# Altium PCB CM5 Nas.PcbDoc (part 1 of 4)
Units mm, origin at the board's own origin, x right, y up, seen from the top; angles counter-clockwise.
Board outline 152.4 x 101.6 mm, 20 copper layers (F.Cu, F.Mask, B.Cu, B.Mask, In1.Cu, F.SilkS, In2.Cu, B.SilkS, F.Adhes, B.Adhes, F.Paste, B.Paste, Dwgs.User, Cmts.User, Eco1.User, Eco2.User, Edge.Cuts, Margin, B.CrtYd, F.CrtYd); 373 components, 619 nets, 1990 pads, 0 vias.
Unrouted connection lines stored in the file: 1086.
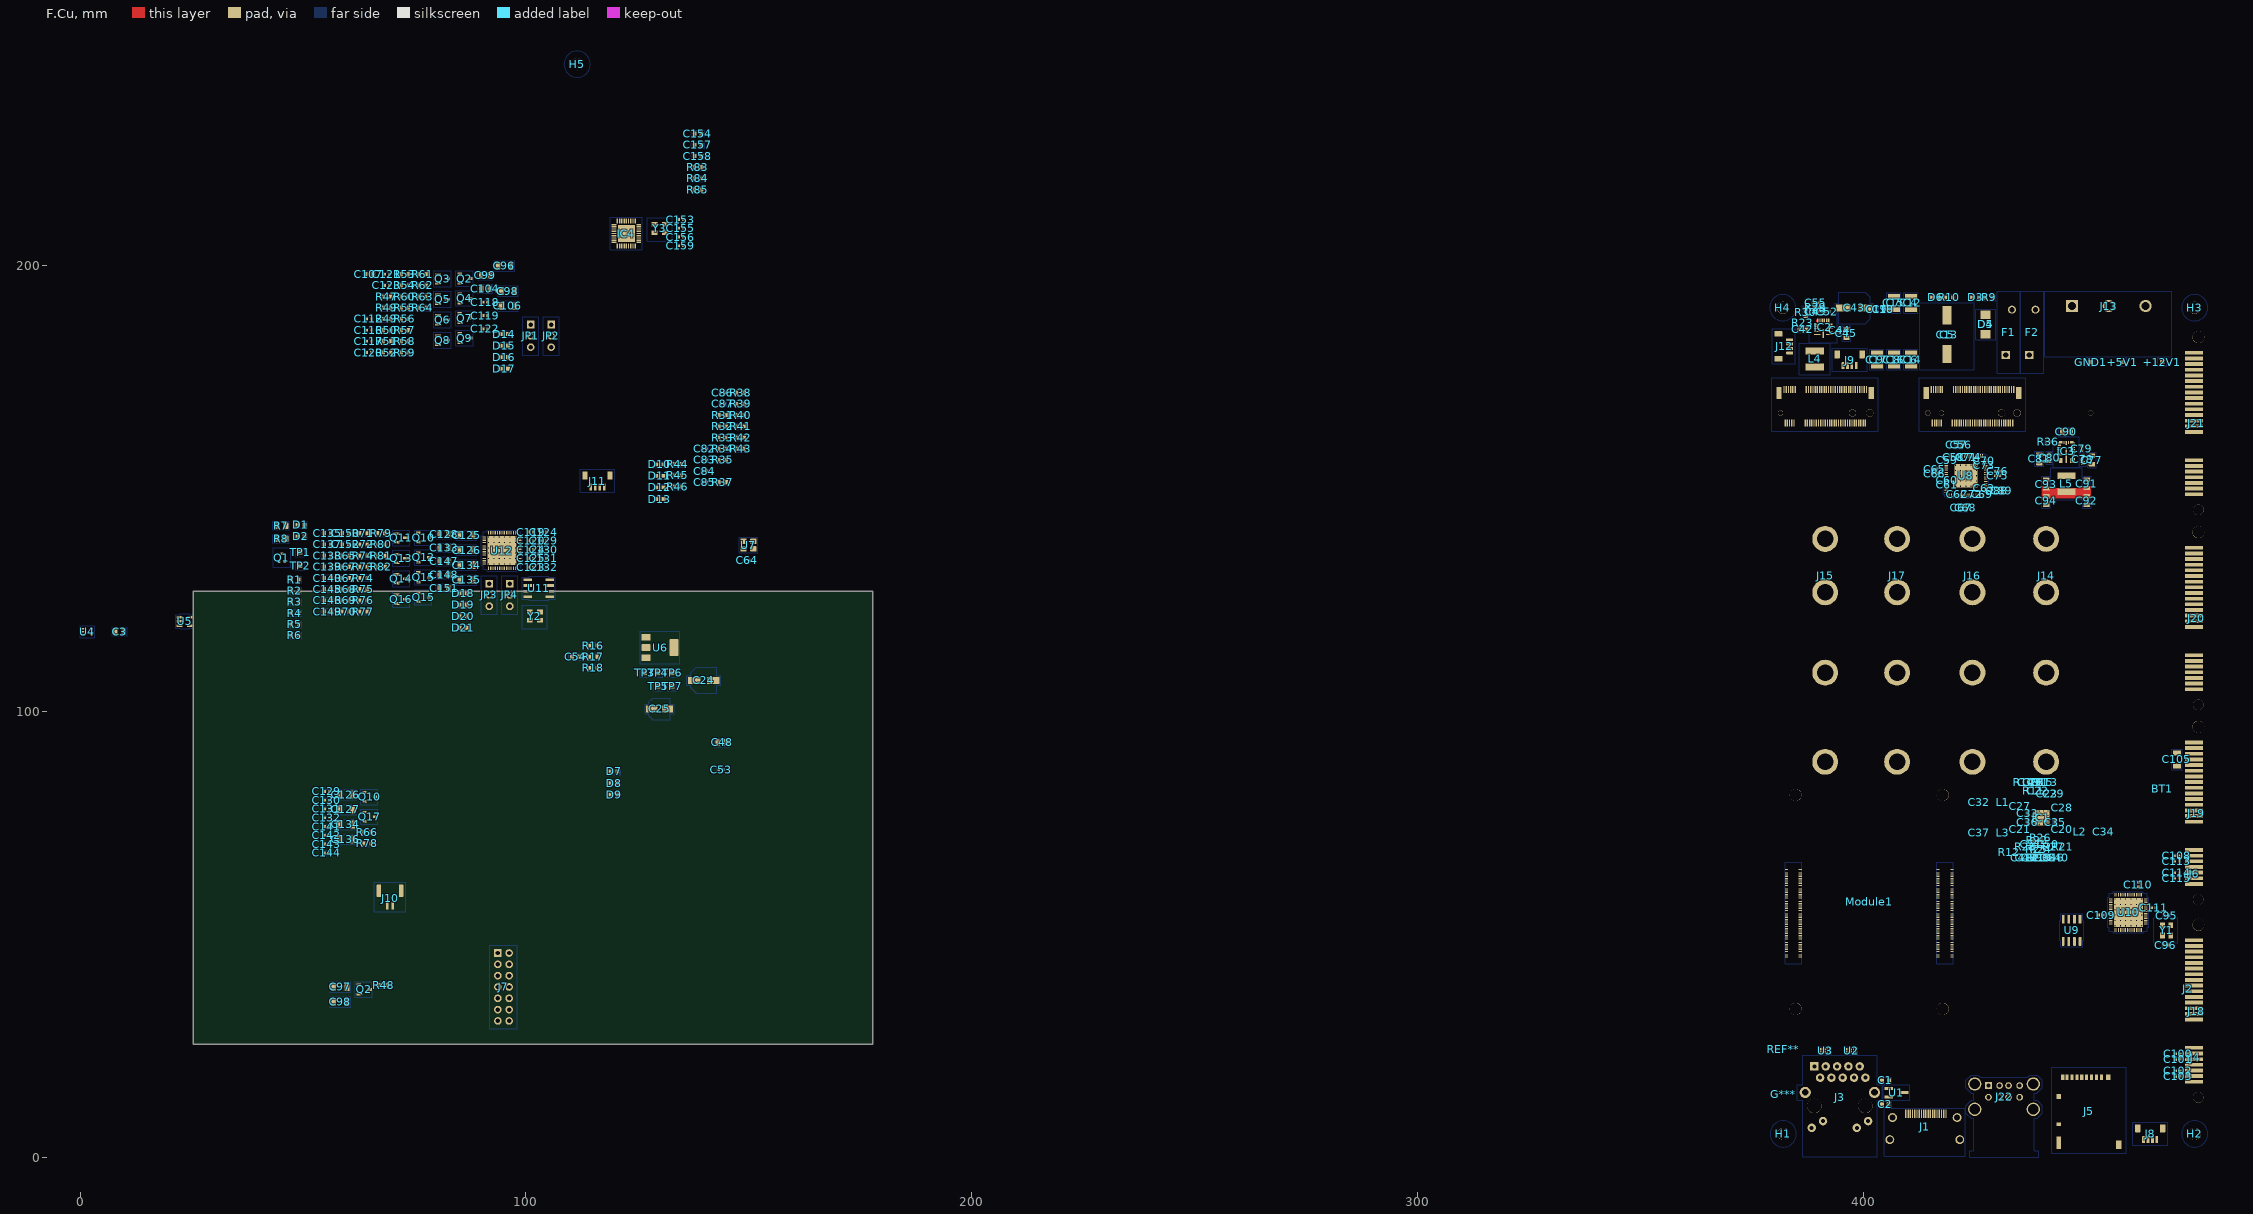
[diagram p0: F.Cu view]
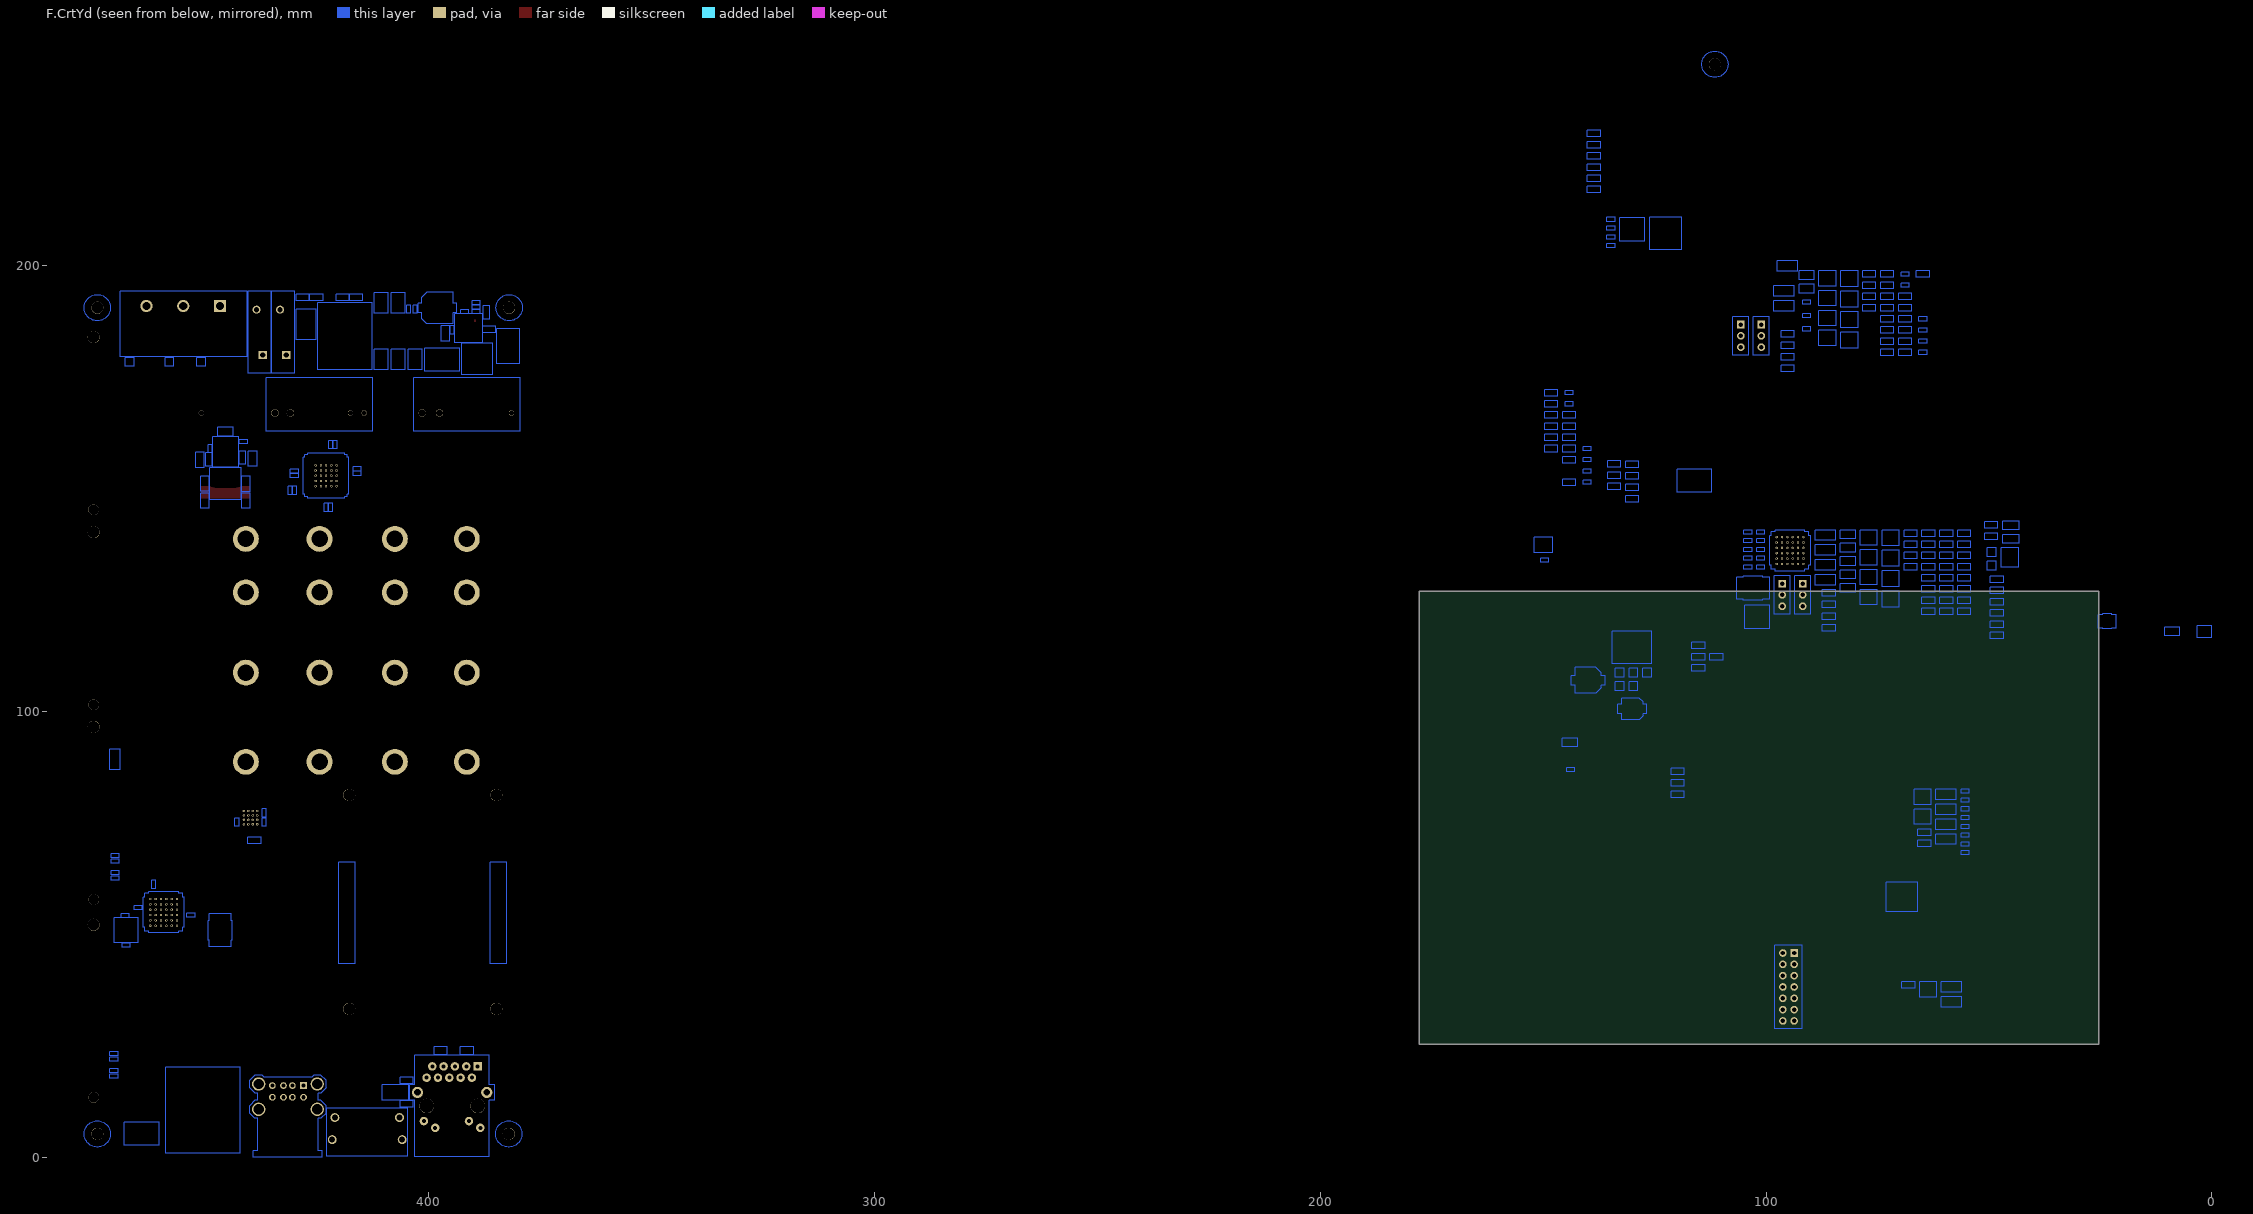
[diagram p1: F.CrtYd view, seen from below]
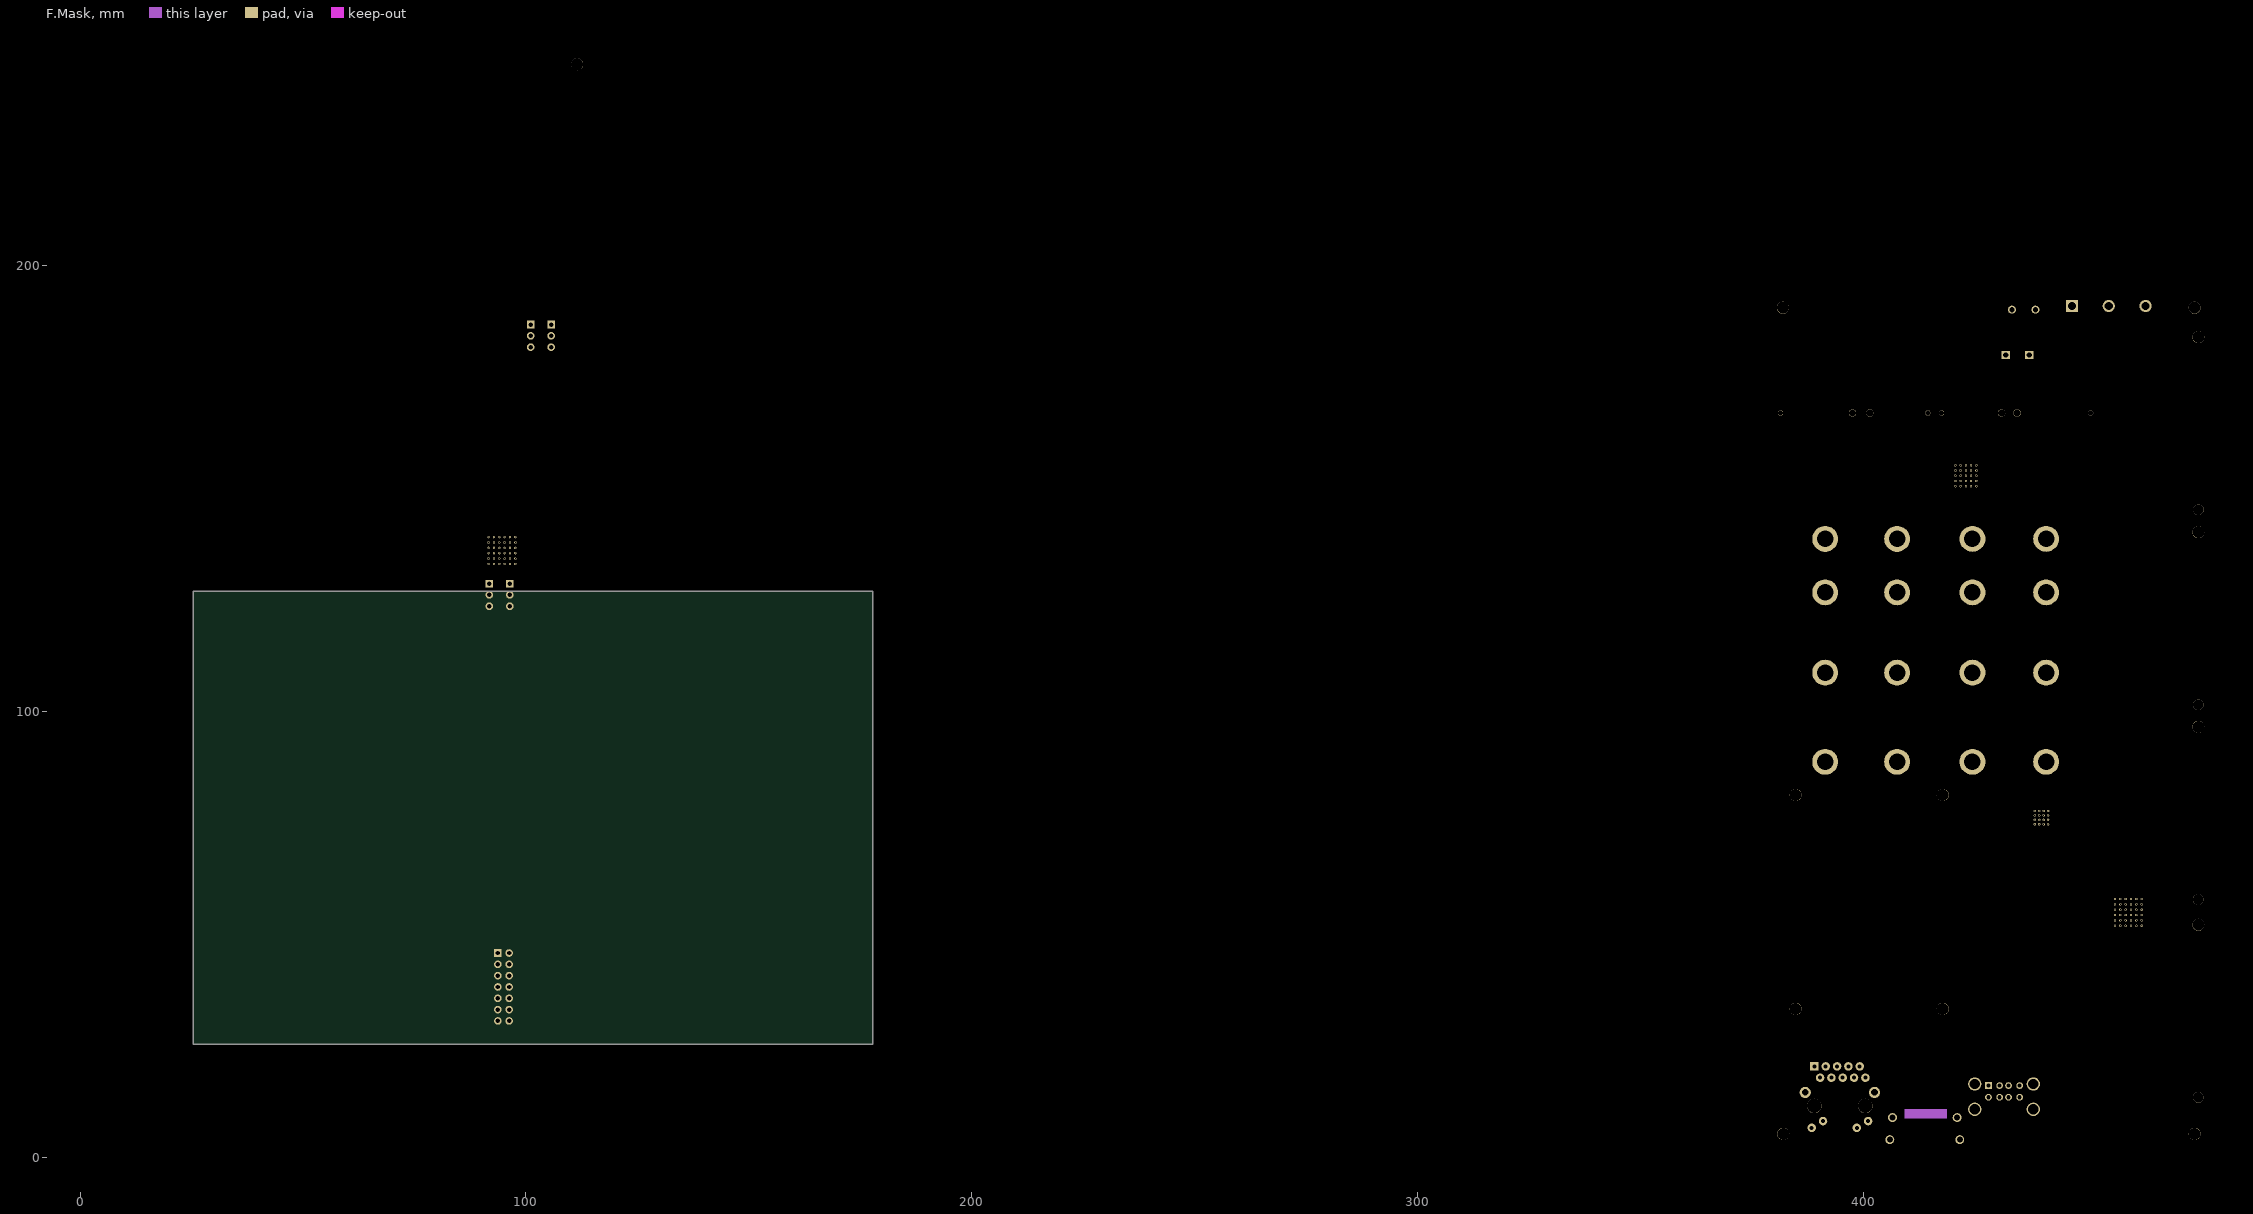
[diagram p2: F.Mask]
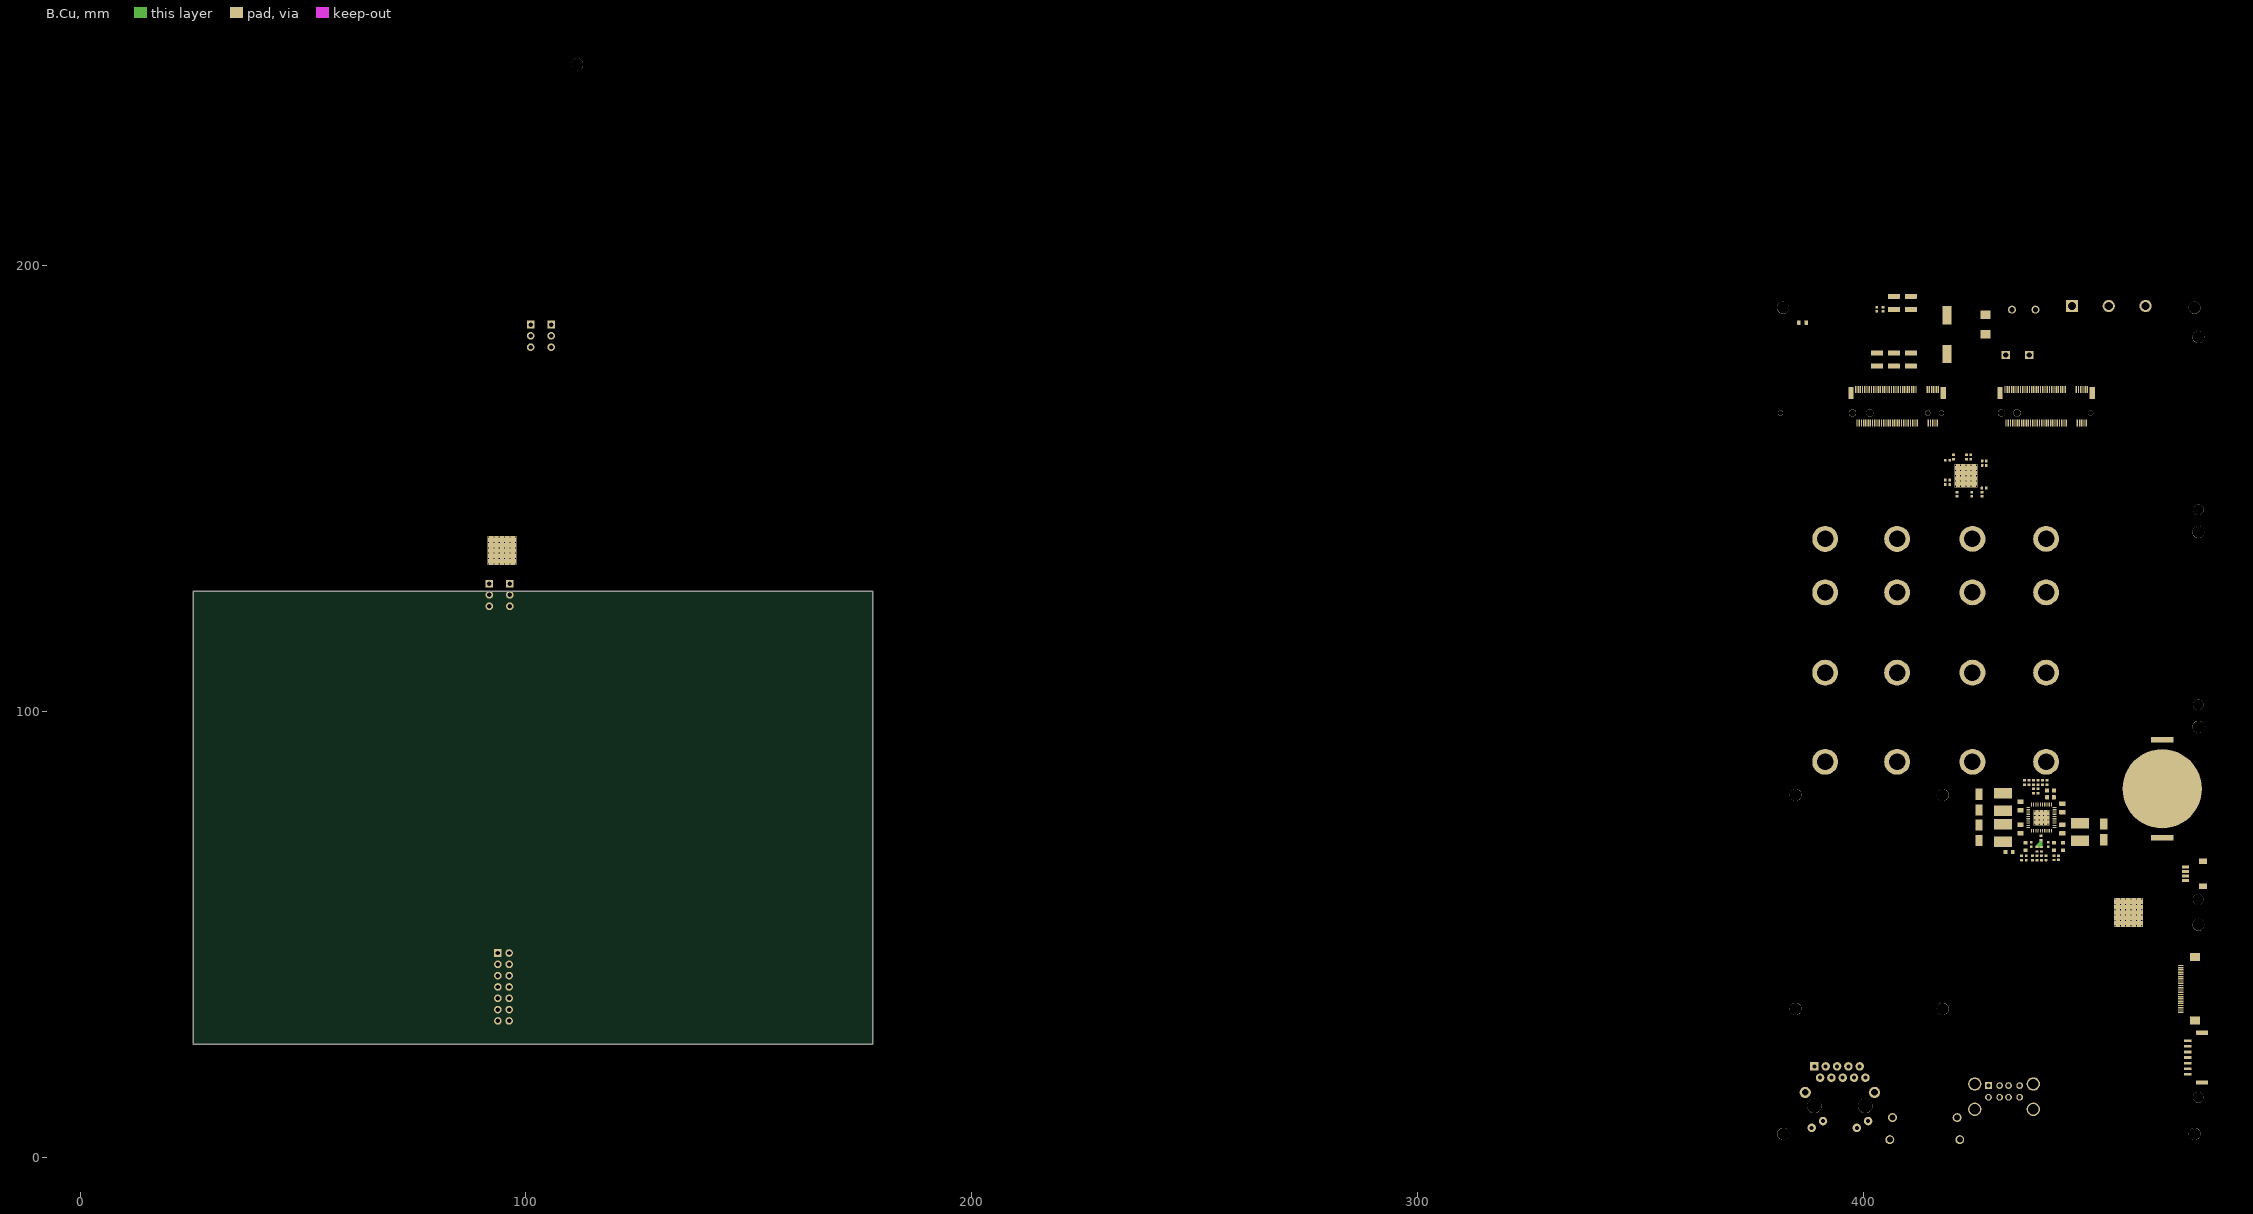
[diagram p3: B.Cu]
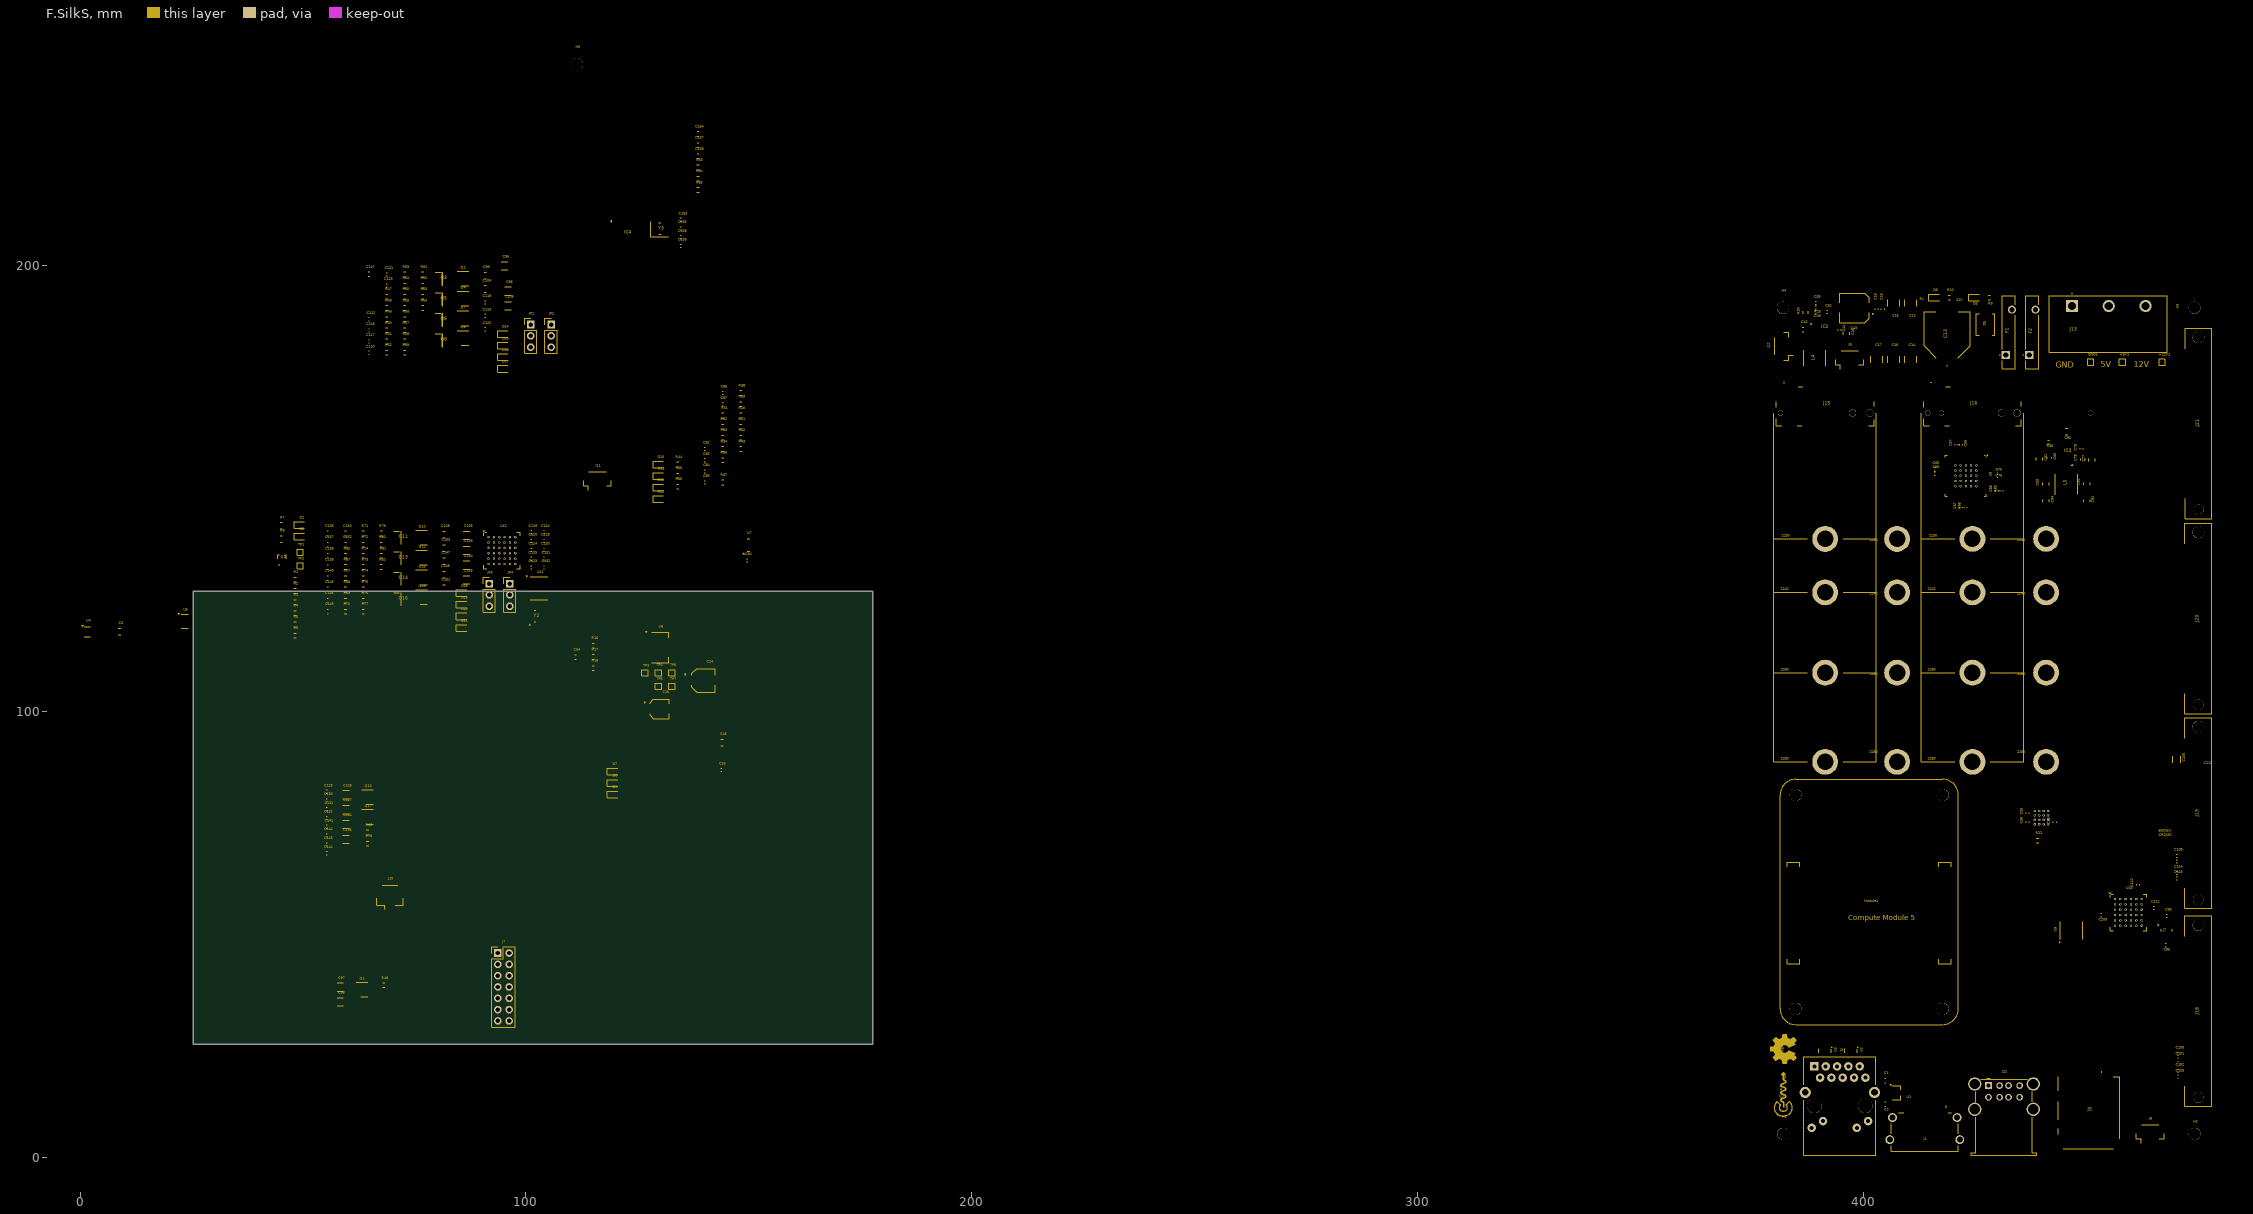
[diagram p4: F.SilkS]
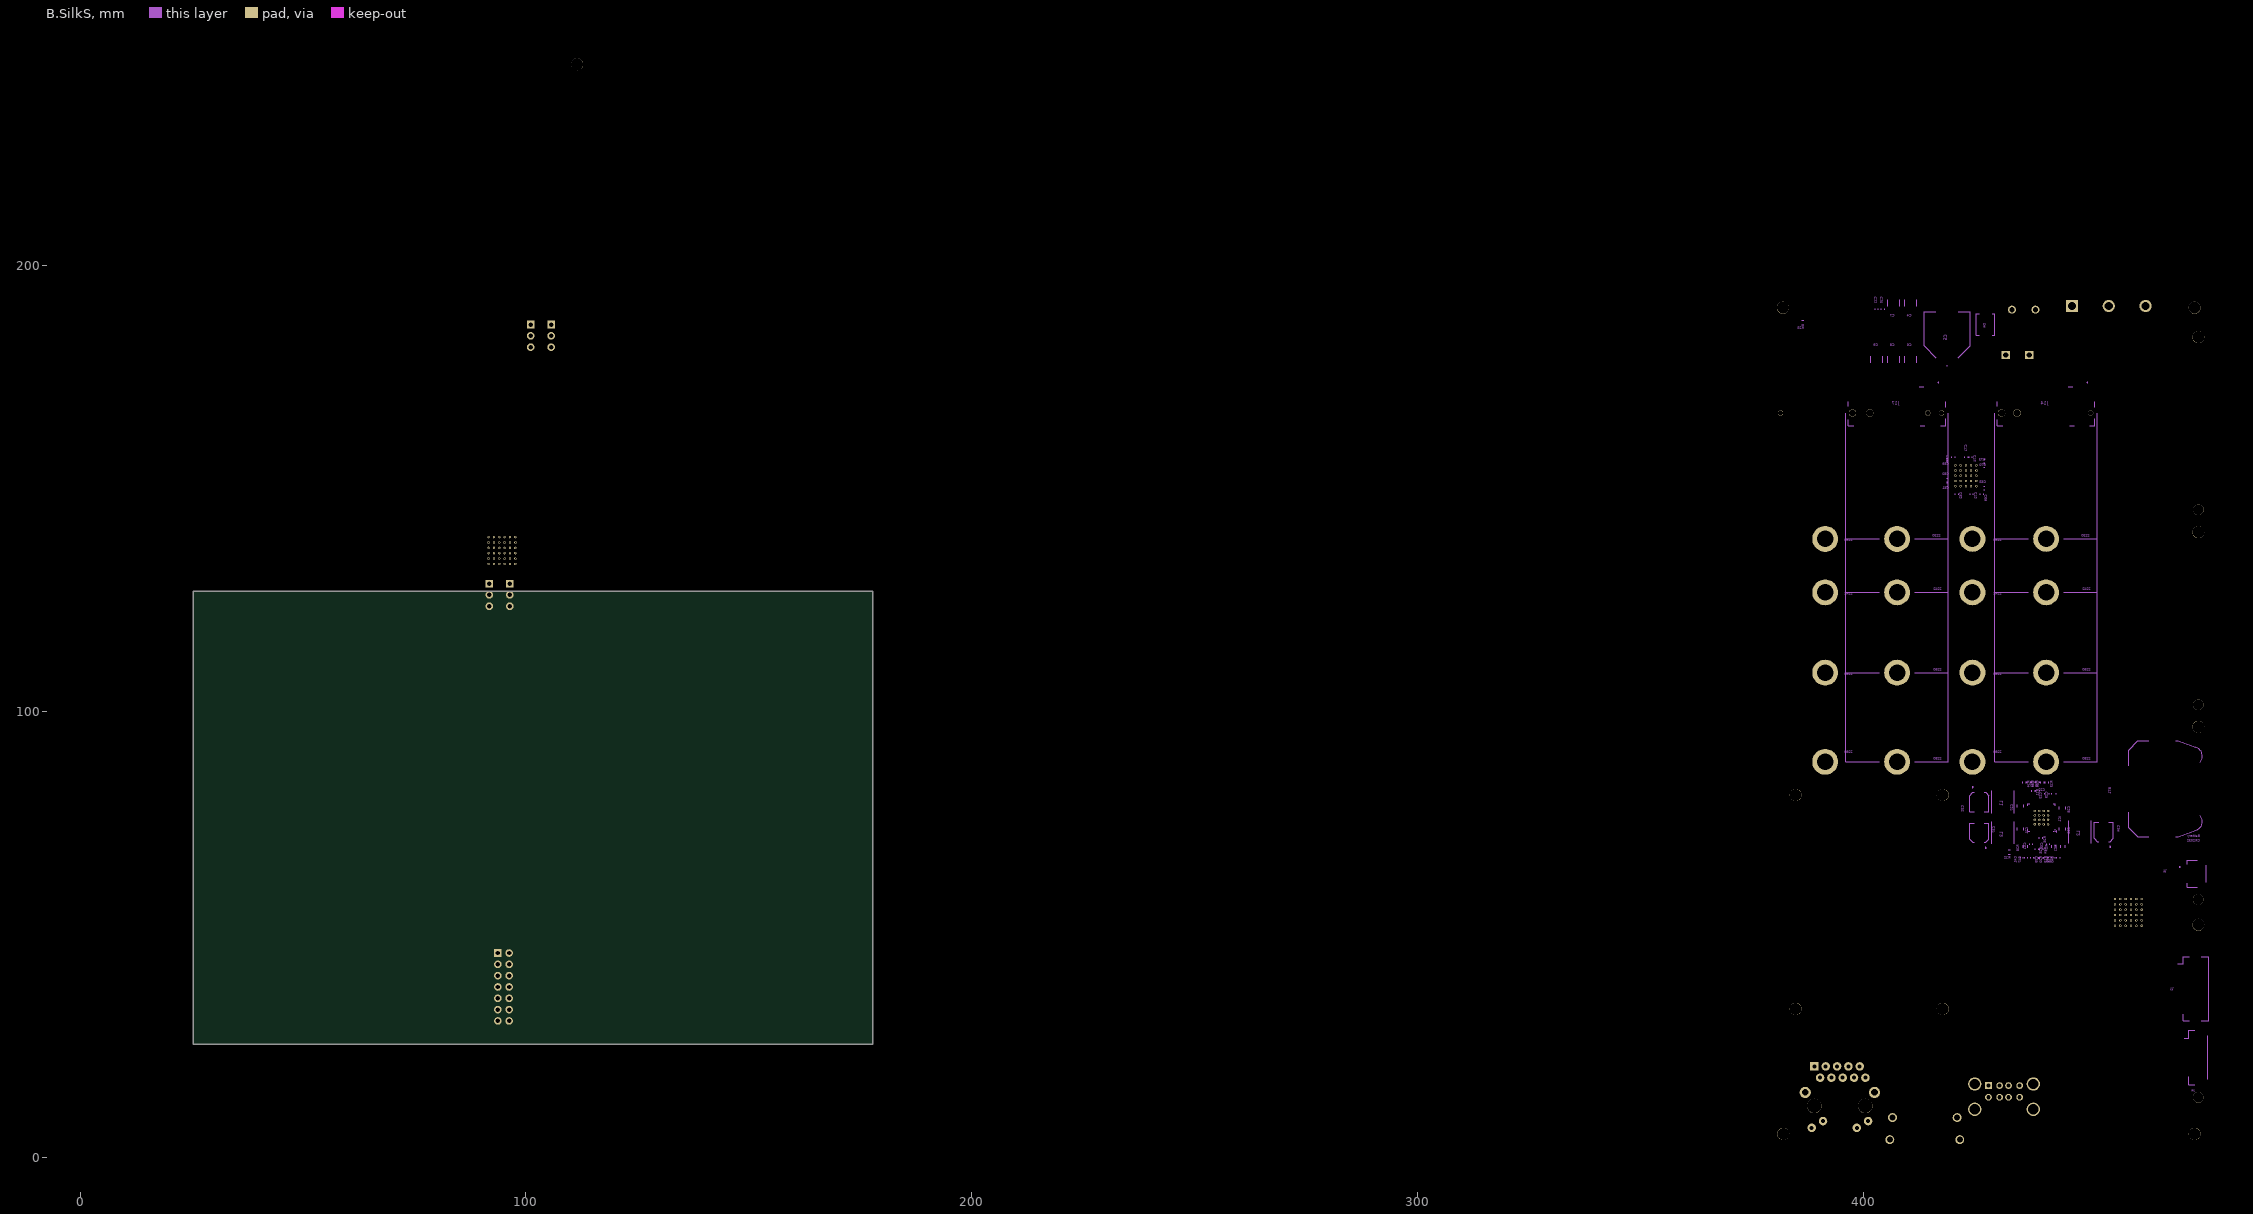
[diagram p5: B.SilkS]
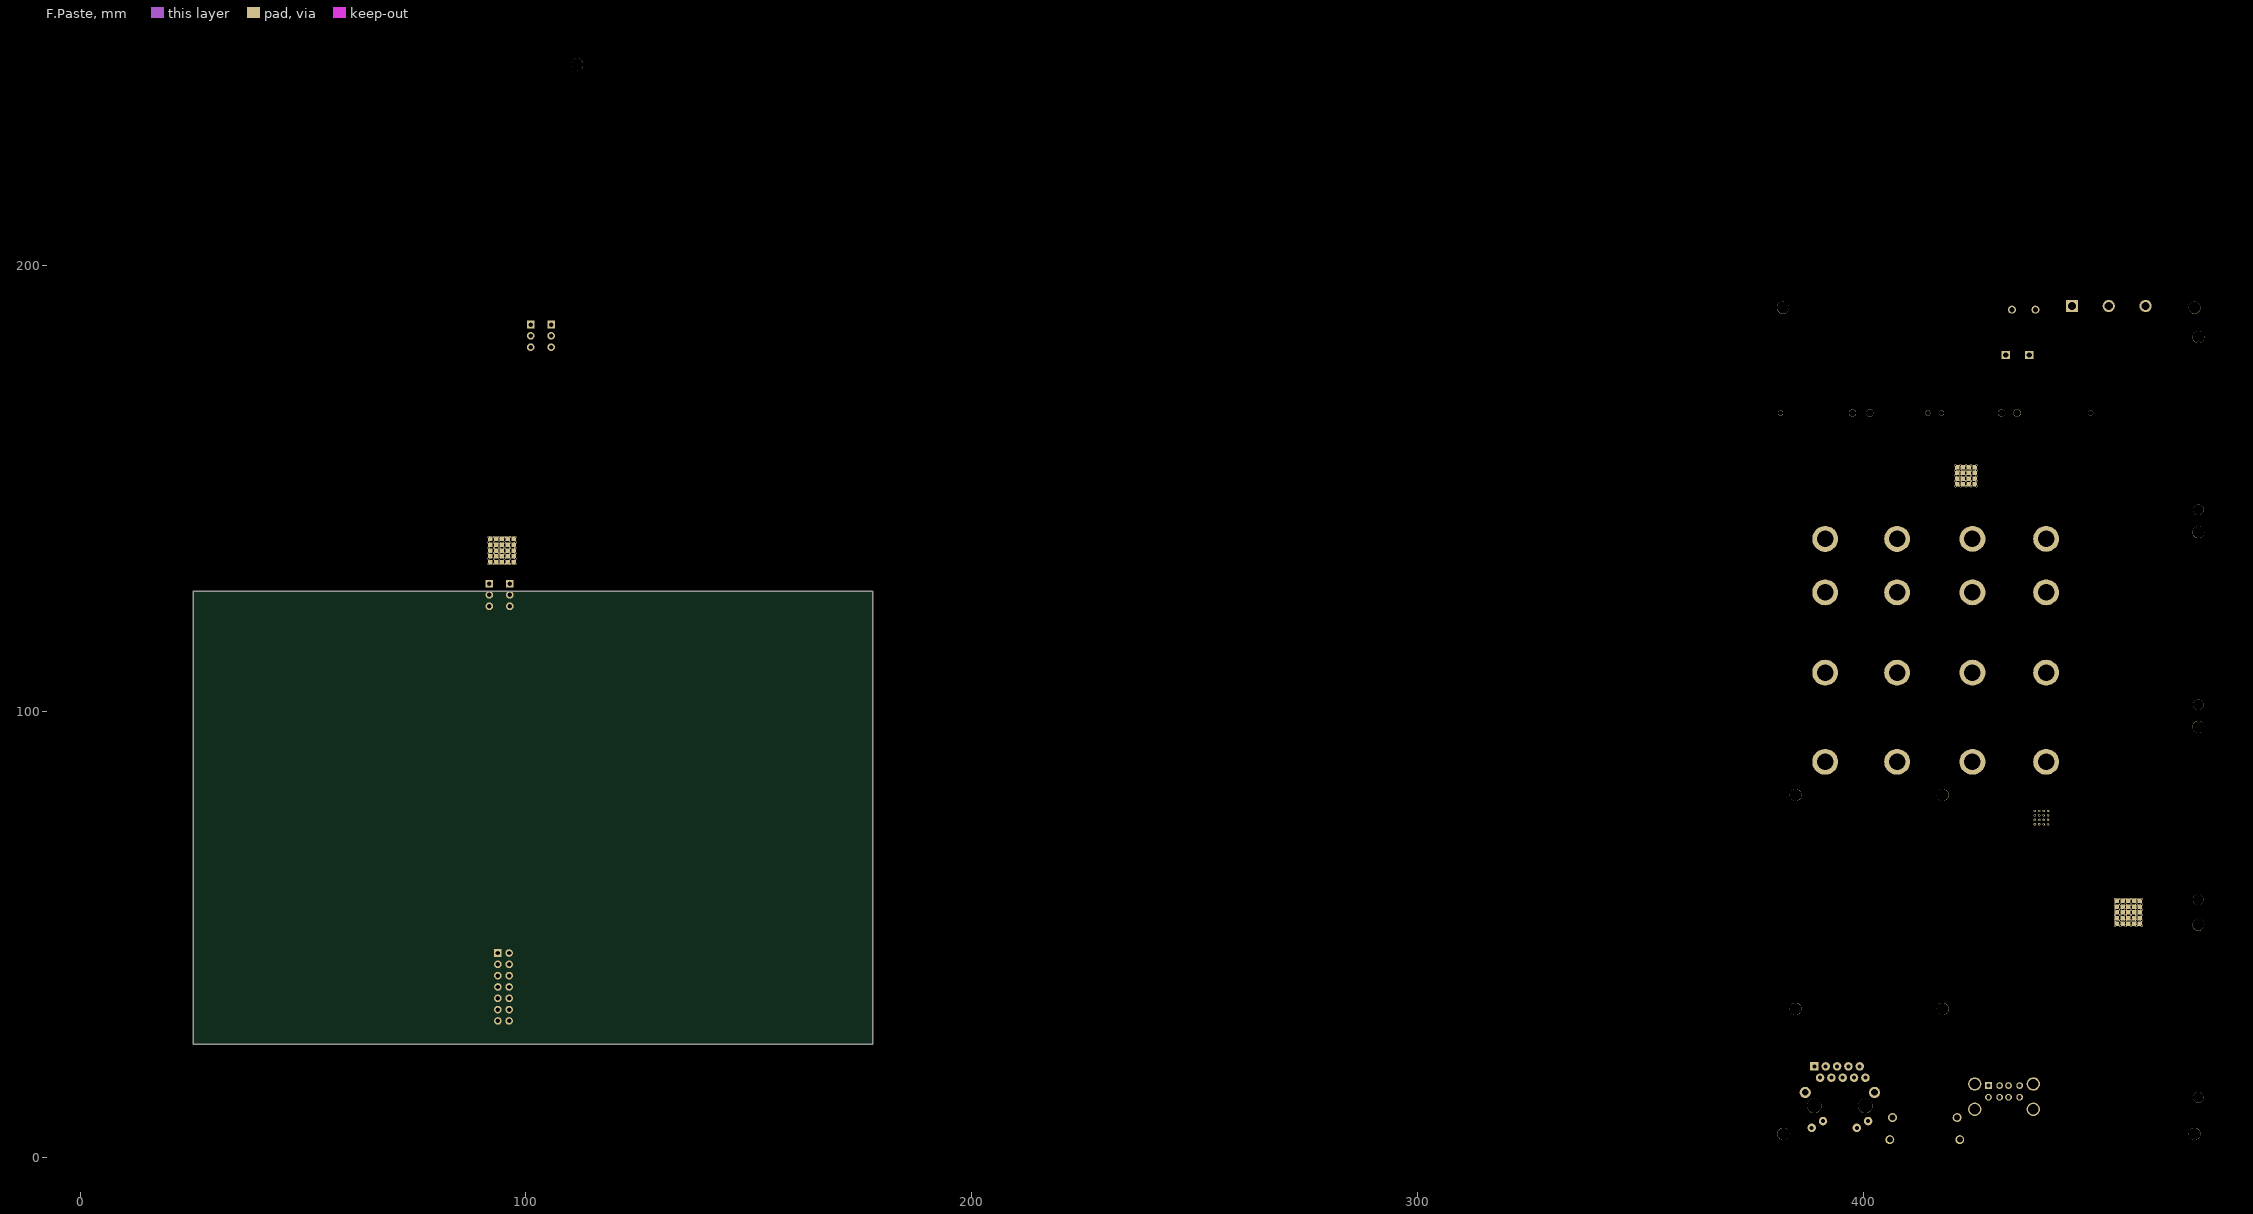
[diagram p6: F.Paste]
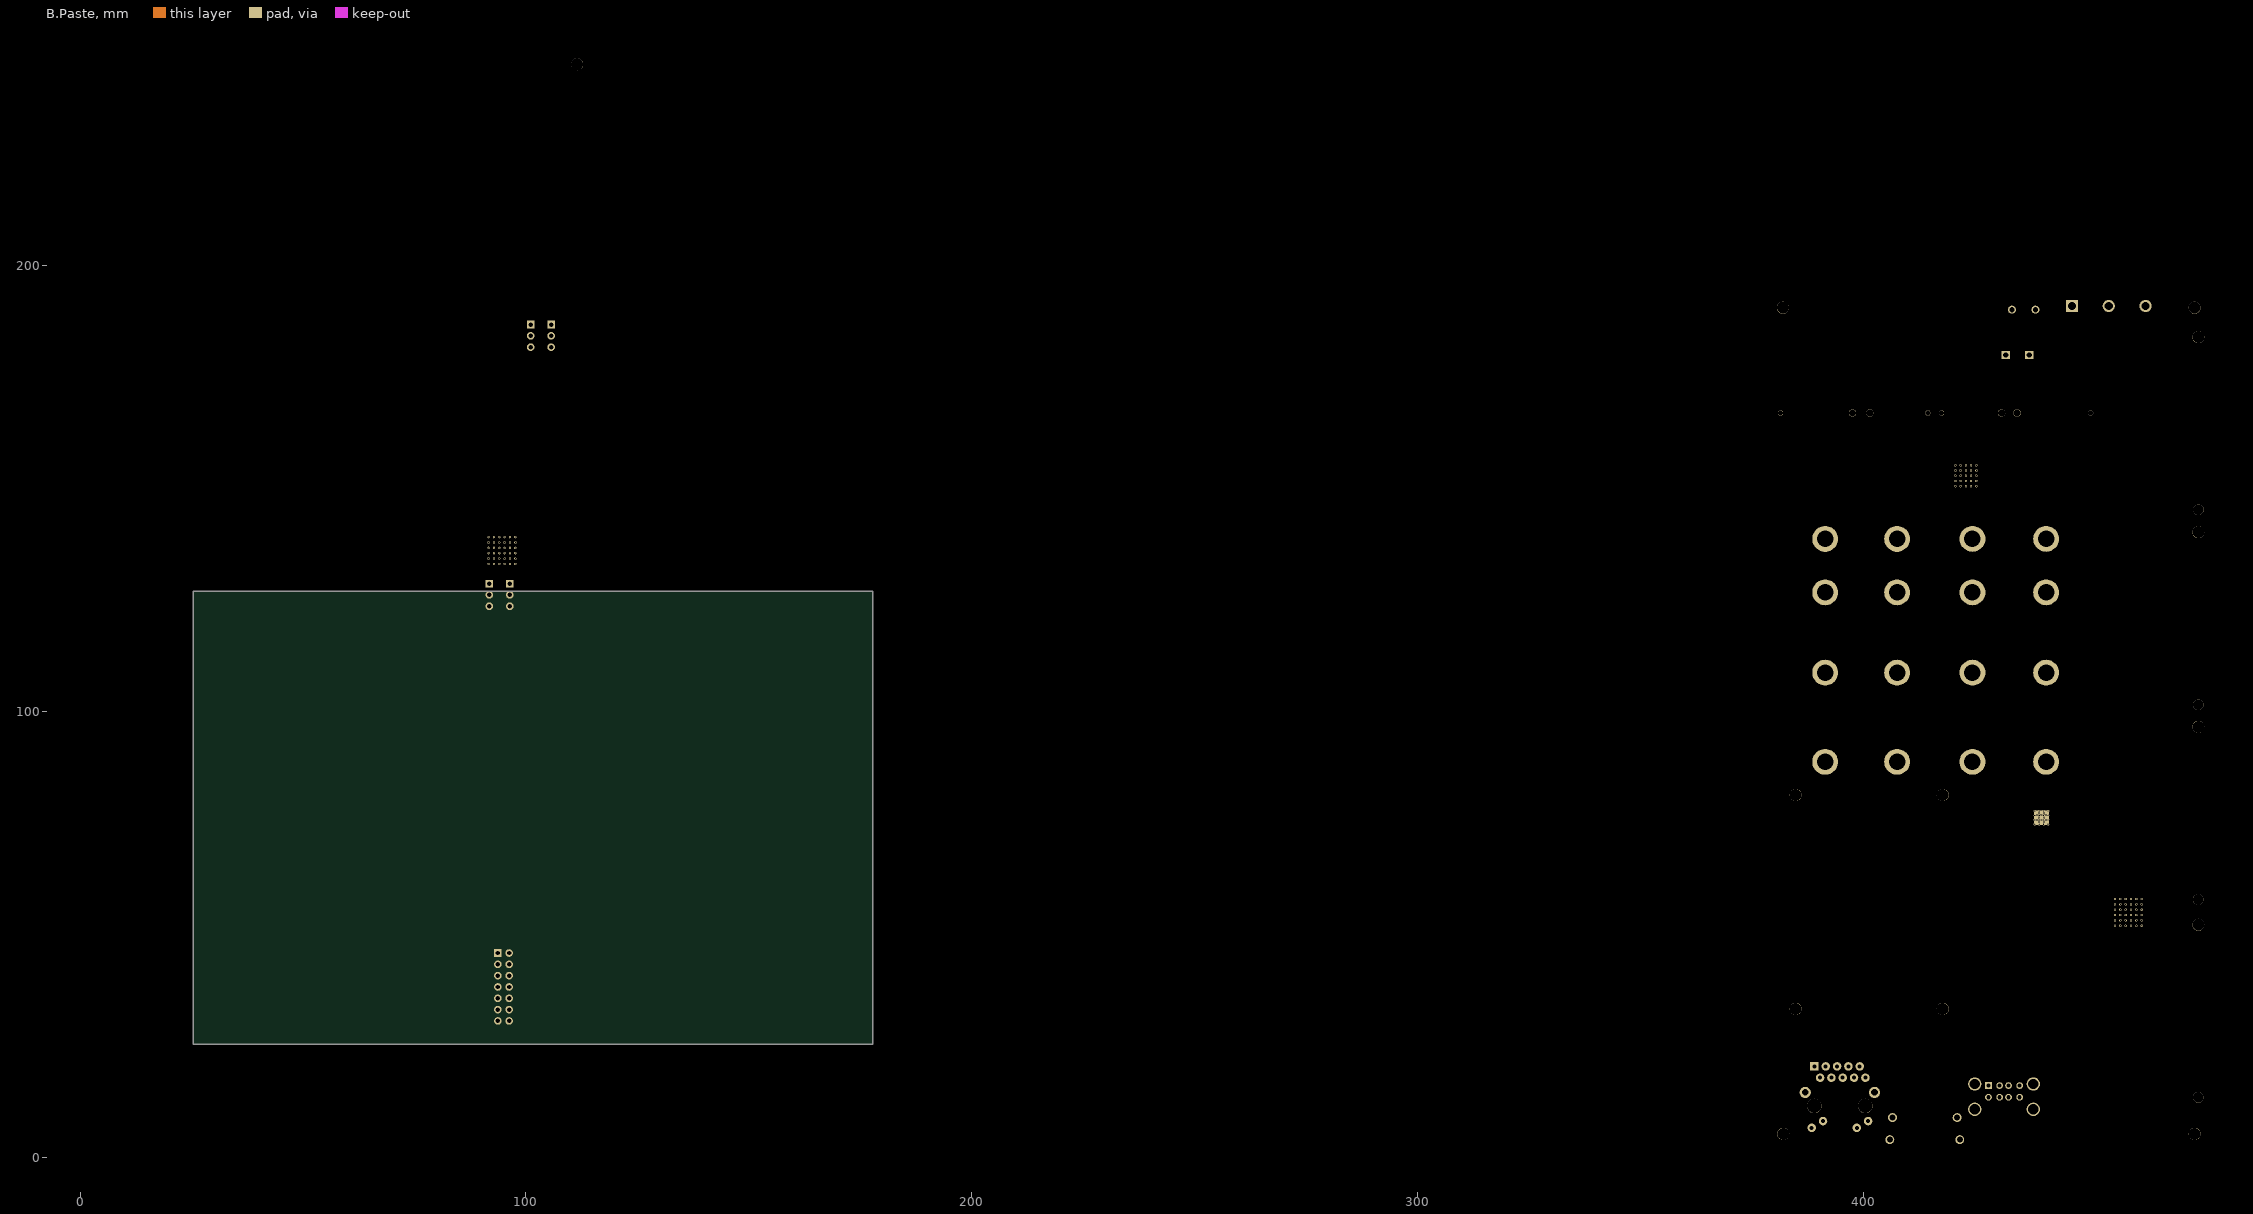
[diagram p7: B.Paste]
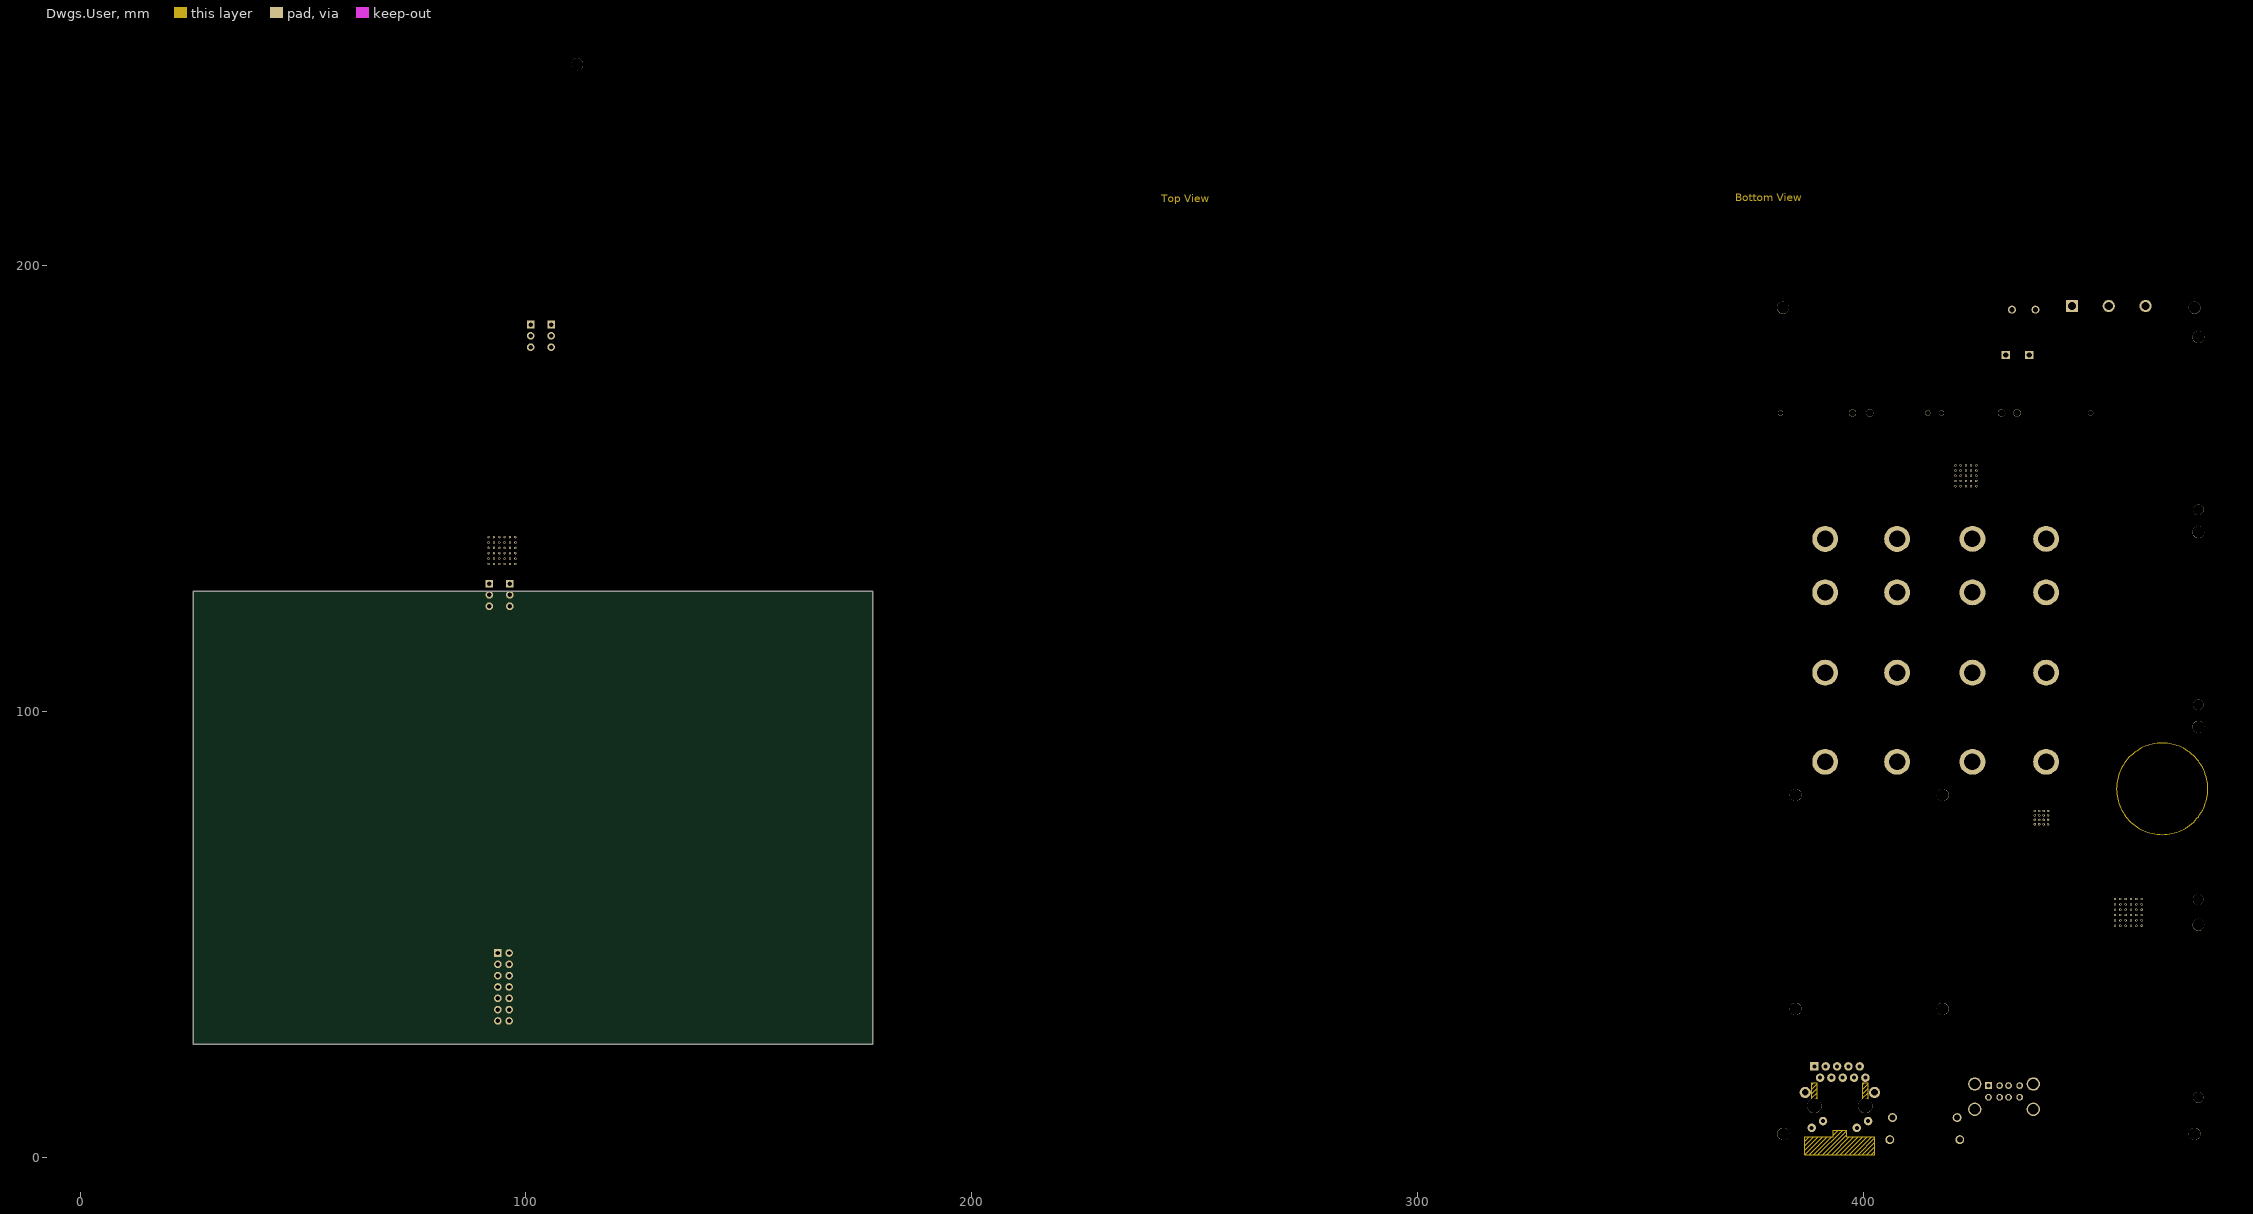
[diagram p8: Dwgs.User]
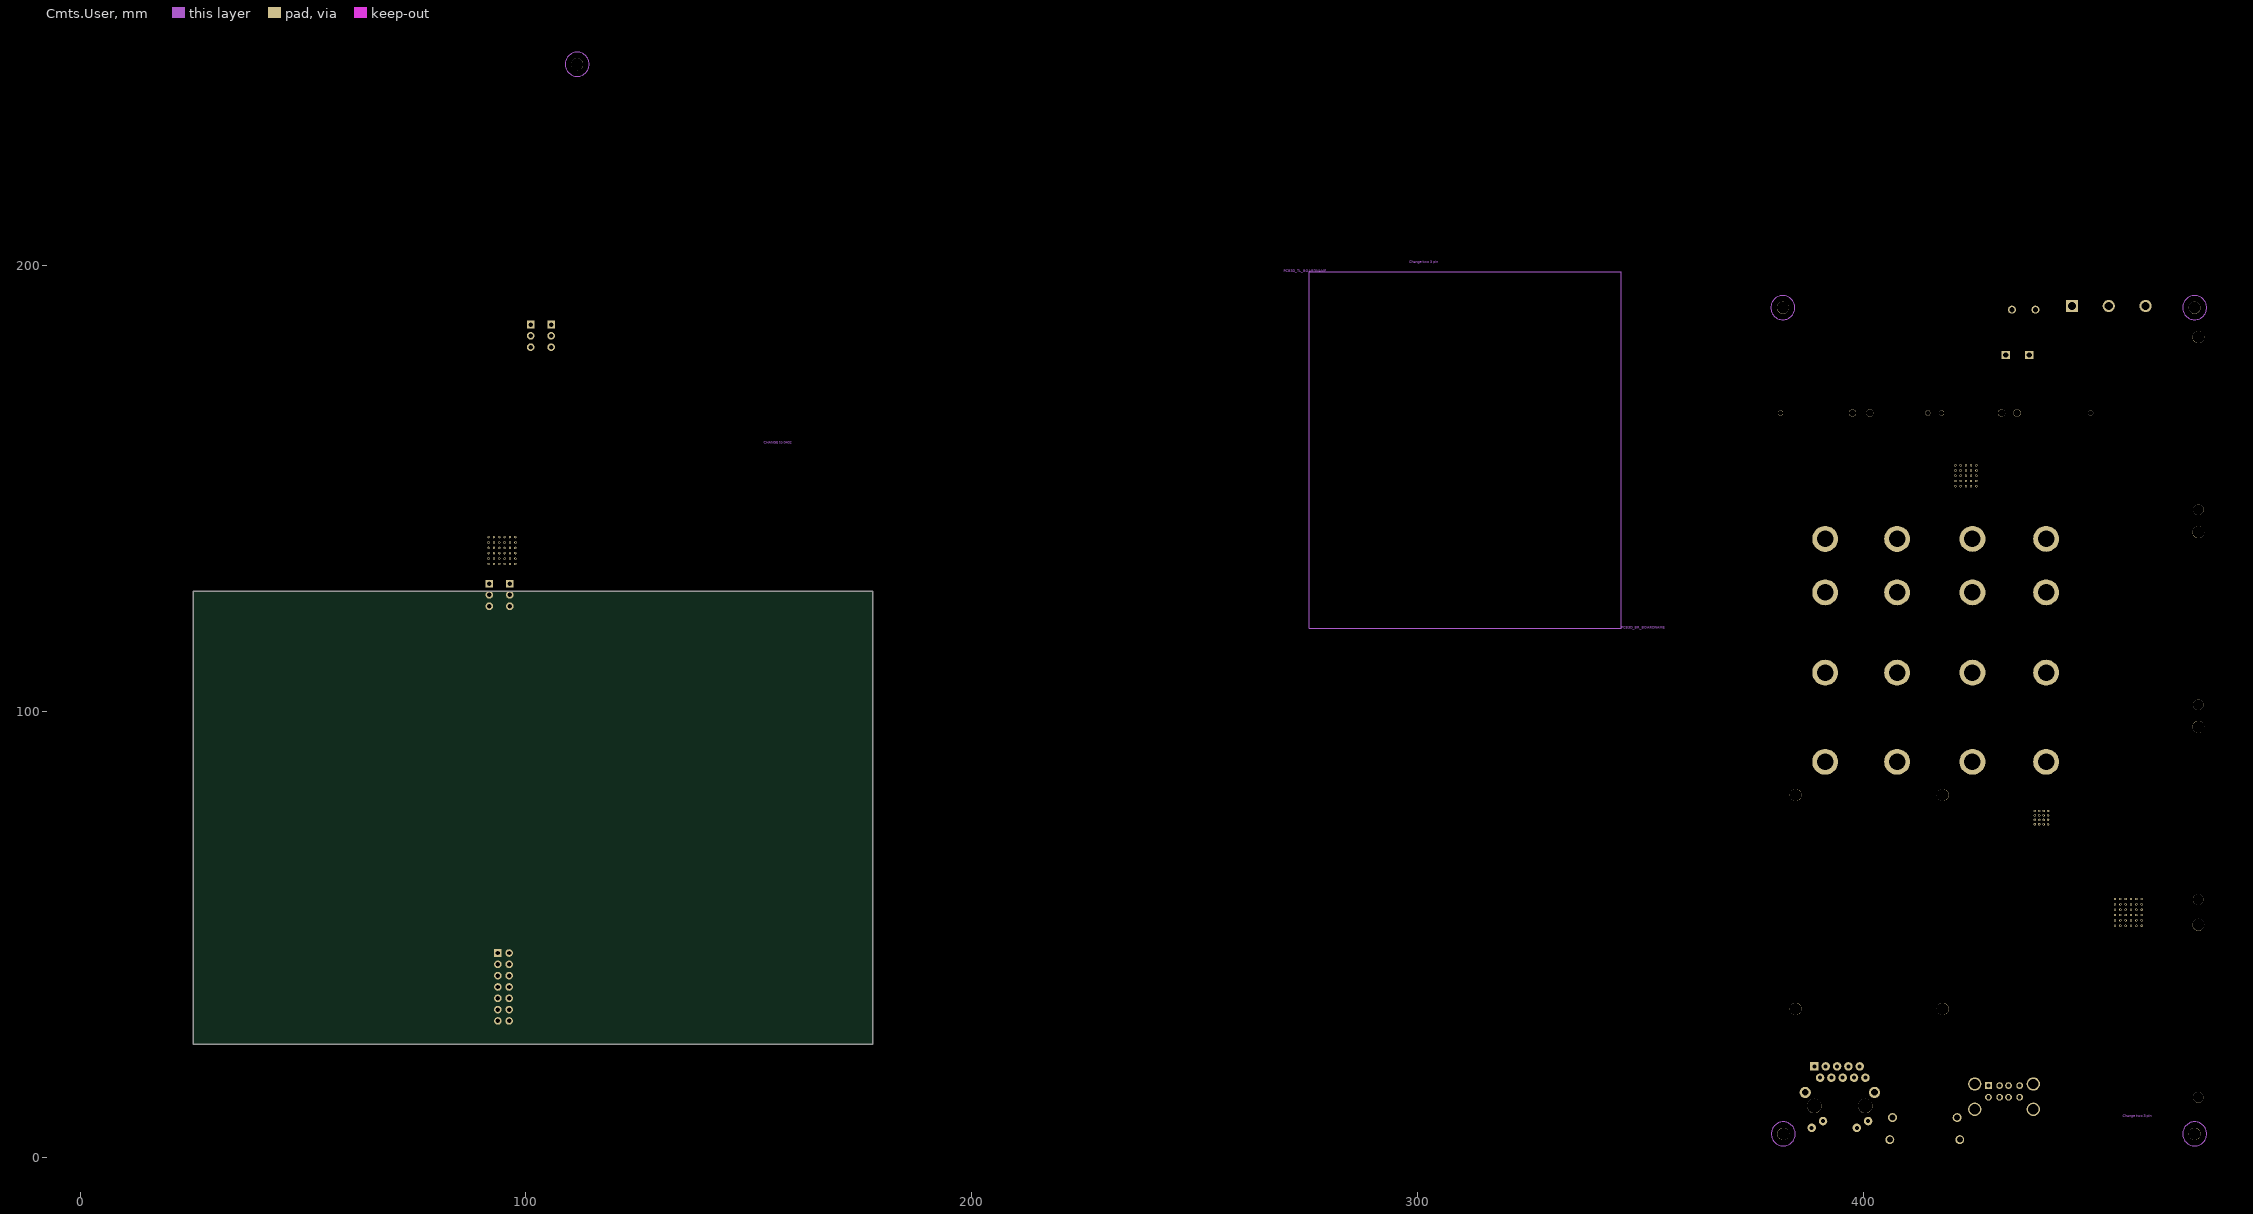
[diagram p9: Cmts.User]
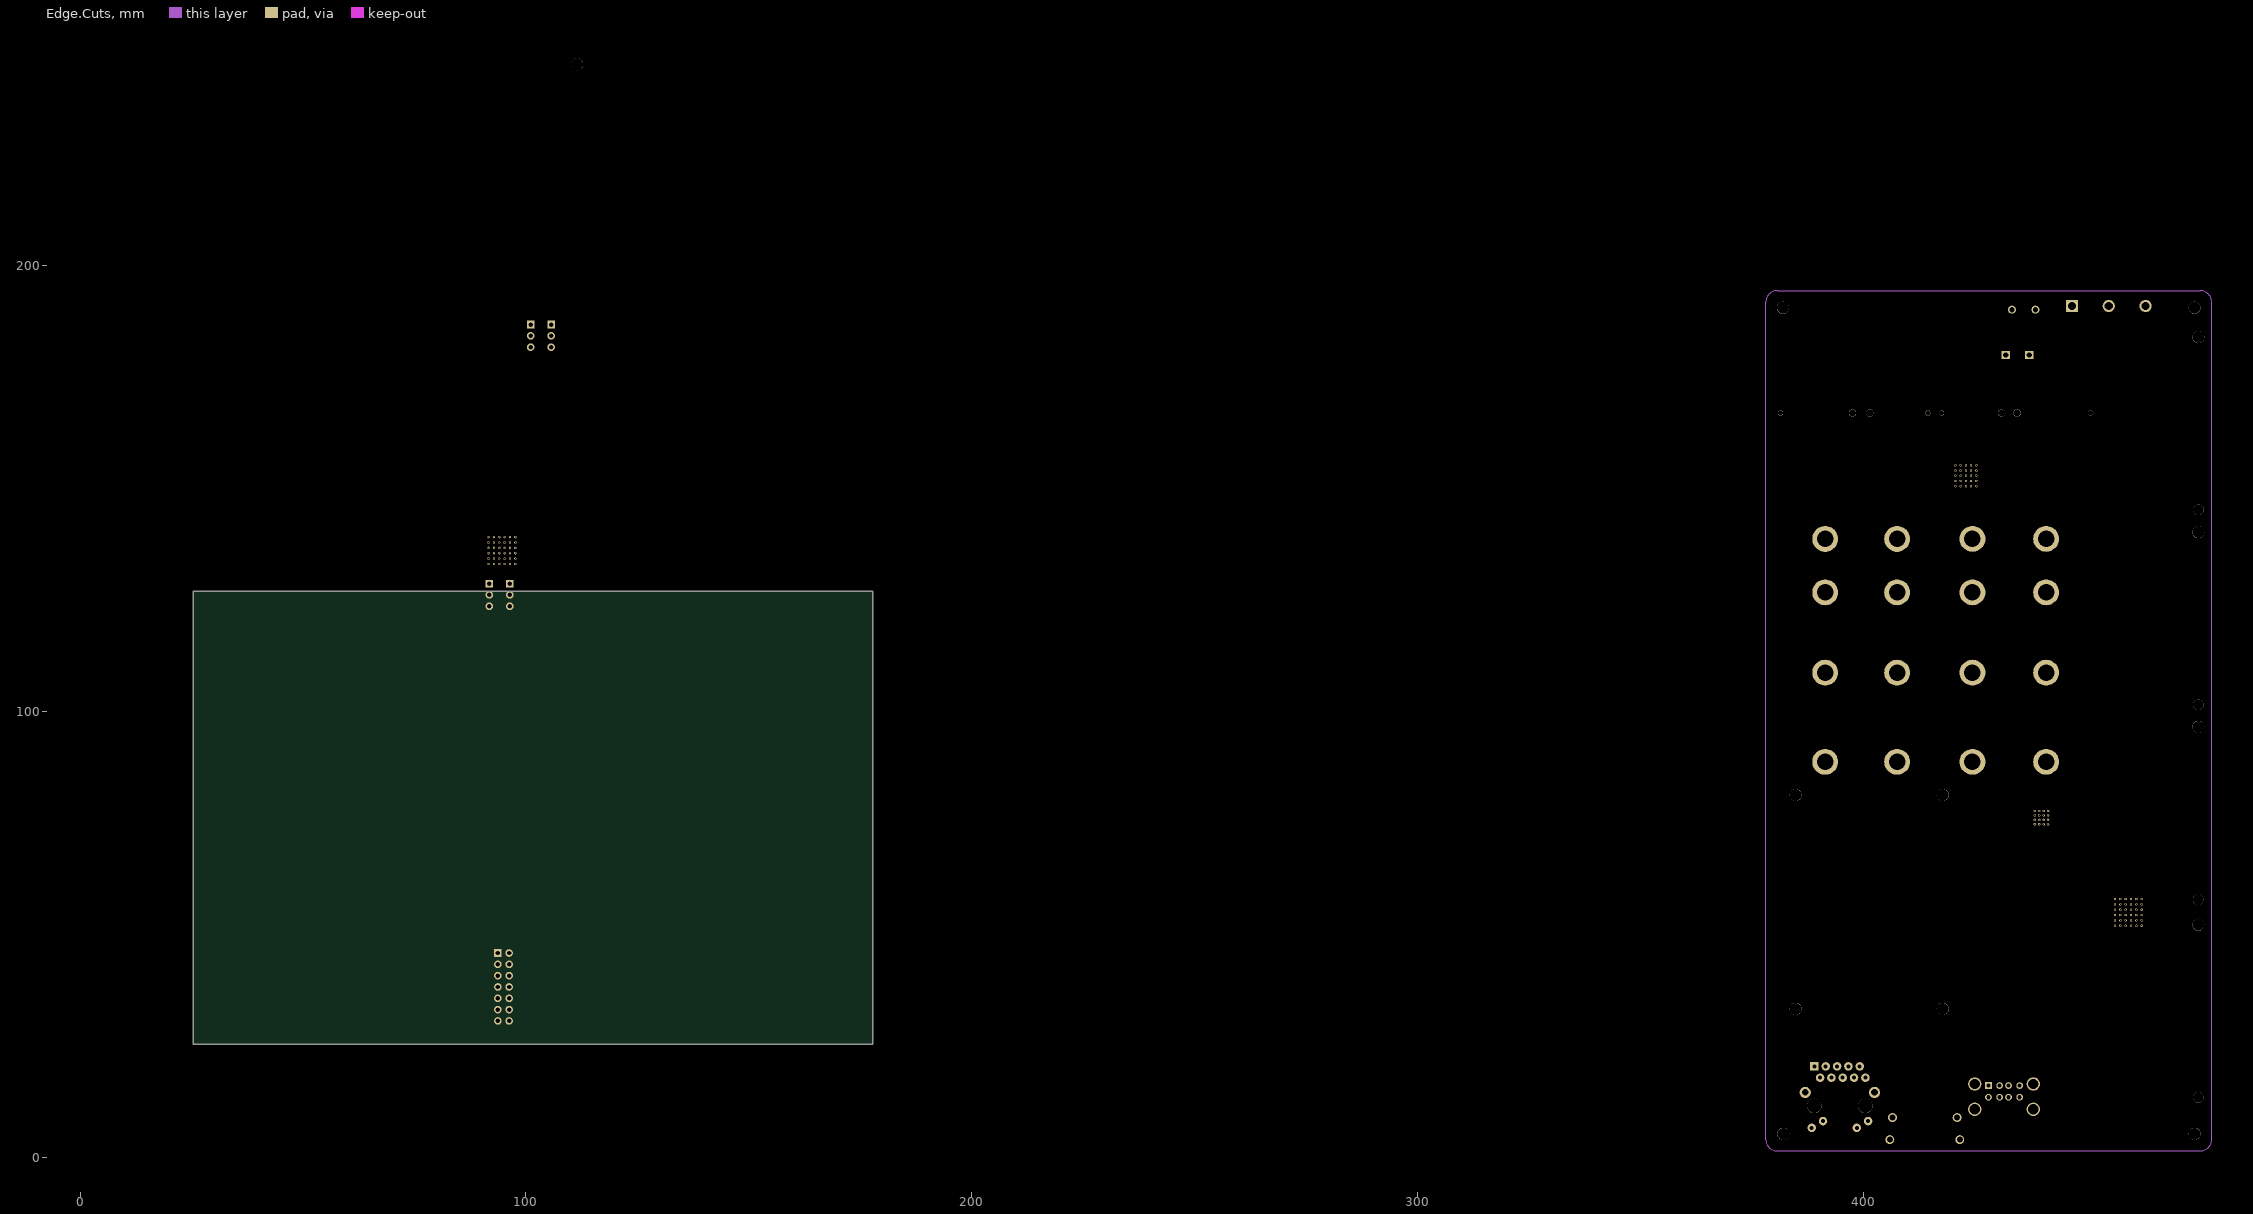
[diagram p10: Edge.Cuts]
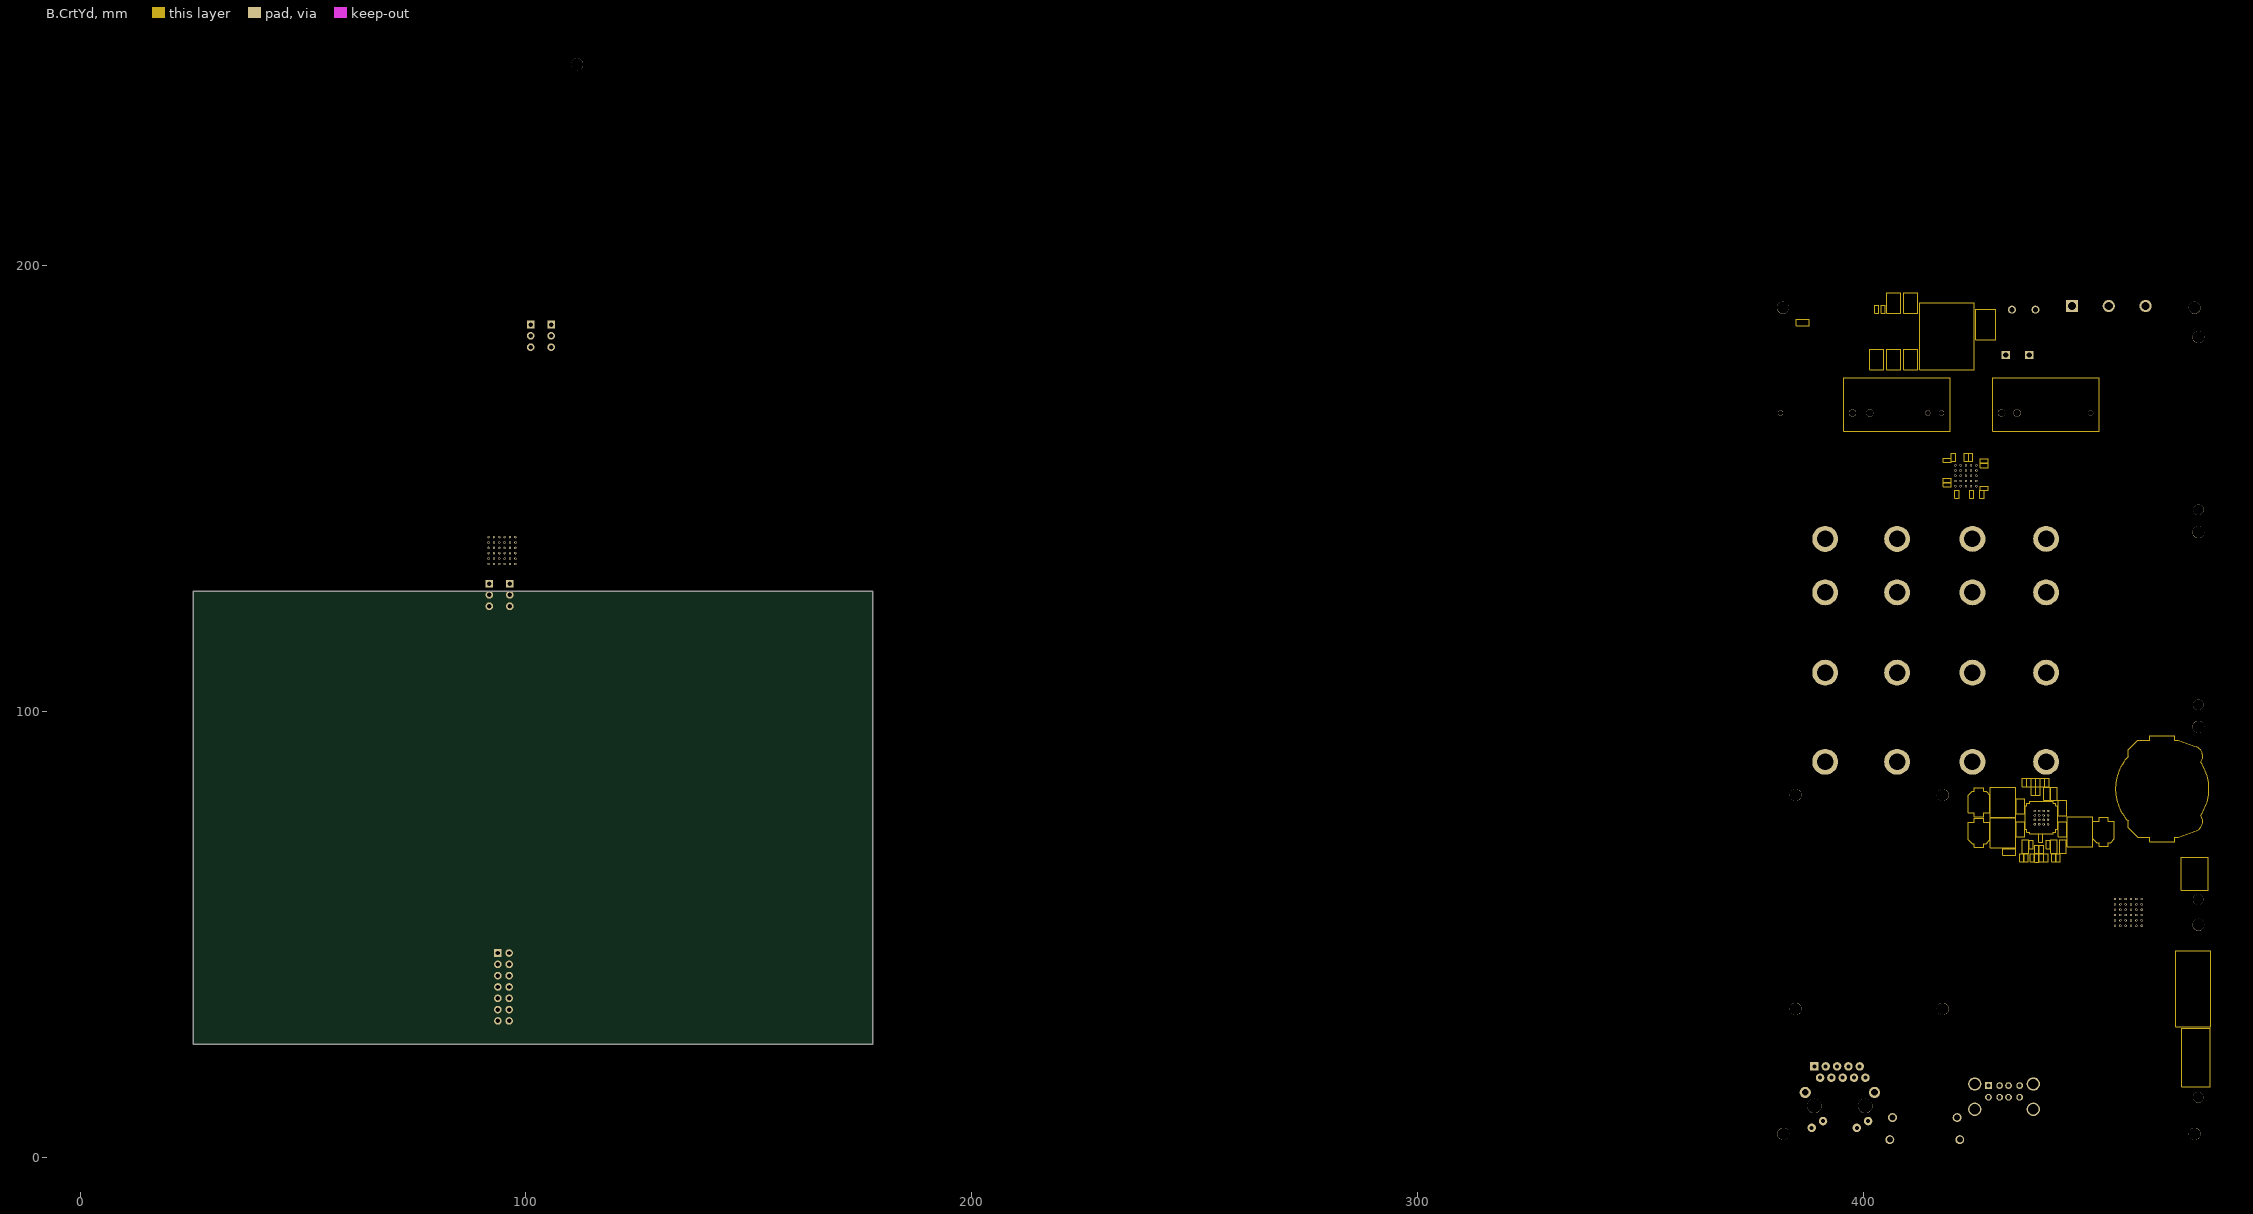
[diagram p11: B.CrtYd]

## Layer stack, top to bottom
Top Solder: solder mask 0.0102, Solder Resist, Dk 3.5
F.Cu: signal copper 0.0356
Dielectric 1: dielectric 0.32, FR-4, Dk 4.8
F.Mask: signal copper 0.0356
Dielectric2: dielectric 0.32, FR-4, Dk 4.8
B.Cu: signal copper 0.0356
Dielectric3: dielectric 0.32, FR-4, Dk 4.8
B.Mask: signal copper 0.0356
Dielectric4: dielectric 0.32, FR-4, Dk 4.8
In1.Cu: signal copper 0.0356
Dielectric5: dielectric 0.32, FR-4, Dk 4.8
F.SilkS: signal copper 0.0356
Dielectric6: dielectric 0.32, FR-4, Dk 4.8
In2.Cu: signal copper 0.0356
Dielectric7: dielectric 0.32, FR-4, Dk 4.8
B.SilkS: signal copper 0.0356
Dielectric8: dielectric 0.32, FR-4, Dk 4.8
F.Adhes: signal copper 0.0356
Dielectric9: dielectric 0.32, FR-4, Dk 4.8
B.Adhes: signal copper 0.0356
Dielectric10: dielectric 0.32, FR-4, Dk 4.8
F.Paste: signal copper 0.0356
Dielectric11: dielectric 0.32, FR-4, Dk 4.8
B.Paste: signal copper 0.0356
Dielectric12: dielectric 0.32, FR-4, Dk 4.8
Dwgs.User: signal copper 0.0356
Dielectric13: dielectric 0.32, FR-4, Dk 4.8
Cmts.User: signal copper 0.0356
Dielectric14: dielectric 0.32, FR-4, Dk 4.8
Eco1.User: signal copper 0.0356
Dielectric15: dielectric 0.32, FR-4, Dk 4.8
Eco2.User: signal copper 0.0356
Dielectric16: dielectric 0.32, FR-4, Dk 4.8
Edge.Cuts: signal copper 0.0356
Dielectric17: dielectric 0.32, FR-4, Dk 4.8
Margin: signal copper 0.0356
Dielectric18: dielectric 0.32, FR-4, Dk 4.8
B.CrtYd: signal copper 0.0356
Dielectric19: dielectric 0.32, FR-4, Dk 4.8
F.CrtYd: signal copper 0.0356
Bottom Solder: solder mask 0.0102, Solder Resist, Dk 3.5

## Board outline
25.4,25.4 177.8,25.4 177.8,127 25.4,127

## Design rules (kind name [scope] priority, off if disabled: settings)
Clearance "Clearence 1.7_PadClass" [InPadClass('Pad Class Clearance 1.7')] p1: gap=1.7 ignorepadtopadclearanceinfootprint=FALSE
MinimumSolderMaskSliver [All] p1: minsoldermaskwidth=0
PolygonConnect [All] p1: connectstyle=Direct reliefconductorwidth=0.254 reliefentries=4 polygonreliefangle="90 Angle" airgapwidth=0.254
RoutingVias [All] p1: holewidth=0.711 width=1.27 viastyle="Through Hole" minholewidth=0.711 minwidth=1.27 maxholewidth=0.711 maxwidth=1.27
SilkToSilkClearance [All] p1: silktosilkclearance=0
SilkToSolderMaskClearance [IsPad] p1: minsilkscreentomaskgap=0 clearancetoexposedcopper=TRUE
SolderMaskExpansion [All] p1: expansion=0.102 istentingtop=FALSE
Width [All] p1: maxlimit=10 minlimit=0.254 preferedwidth=0.254 midlayer3_maxwidth=0.254 midlayer4_maxwidth=0.254 midlayer6_maxwidth=0.254 midlayer9_maxwidth=0.254 midlayer11_maxwidth=0.254 midlayer13_maxwidth=0.254 midlayer15_maxwidth=0.254 midlayer21_maxwidth=0.254 midlayer23_maxwidth=0.254 midlayer27_maxwidth=0.254 minimp=50.000000 maximp=50.000000 favimp=50.000000
27 further rules are at their usual default settings.

## Classes and differential pairs
pad class "Pad Class Clearance 1.7": Module1-Un1 Module1-Un2 Module1-Un3 Module1-Un4

## Components (designator, comment, footprint, x,y, rotation, side; value= is the part's Value field where it differs from the comment)
+5V1 "Comment" TestPoint_Pad_1.0x1.0mm 458.18,178.436 r0 top value=TestPoint
+12V1 "Comment" TestPoint_Pad_1.0x1.0mm 467.07,178.436 r0 top value=TestPoint
BT1 "Comment" BatteryHolder_Keystone_3034_1x20mm 467.07,82.678 r270 top value=Battery_Cell
C1 "Comment" C_0603_1608Metric#1 404.967,17.273 r0 top value=100n
C2 "Comment" C_0603_1608Metric#1 404.954,11.939 r180 top value=100n
C3 "Comment" C_0805_2012Metric#1 8.84,117.958 r0 top value=10u
C4 "Comment" C_1210_3225Metric#1 410.682,191.693 r90 top value=1u
C5 "Comment" EEE0JA152UAP#1 418.81,184.564 r90 top value=1000u
C6 "Comment" C_1210_3225Metric#1 410.682,178.993 r270 top value=10u
C7 "Comment" C_1210_3225Metric#1 406.872,191.693 r90 top value=10u
C8 "Comment" C_1210_3225Metric#1 406.872,178.993 r270 top value=10u
C9 "Comment" C_1210_3225Metric#1 403.062,178.993 r270 top value=10u
C10 "Comment" C_0402_1005Metric#1 404.459,190.268 r90 top value=100n
C11 "Comment" C_0402_1005Metric#1 403.062,190.268 r90 top value=100n
C12 "Comment" C_1210_3225Metric#2 410.682,191.693 r90 top value=1u
C13 "Comment" EEE0JA152UAP#2 418.81,184.564 r90 top value=1000u
C14 "Comment" C_1210_3225Metric#2 410.682,178.993 r270 top value=10u
C15 "Comment" C_1210_3225Metric#2 406.872,191.693 r90 top value=10u
C16 "Comment" C_1210_3225Metric#2 406.872,178.993 r270 top value=10u
C17 "Comment" C_1210_3225Metric#2 403.062,178.993 r270 top value=10u
C18 "Comment" C_0402_1005Metric#2 404.459,190.268 r90 top value=100n
C19 "Comment" C_0402_1005Metric#2 403.062,190.268 r90 top value=100n
C20 "Comment" C_0805_2012Metric#2 444.683,73.635 r90 top value=22u
C21 "Comment" C_0805_2012Metric#2 435.285,73.645 r90 top value=22u
C22 "Comment" C_0402_1005Metric#1 439.222,82.205 r90 top value=100p
C23 "Comment" C_0603_1608Metric#2 441.254,81.57 r270 top value=10u
C24 "Comment" CAP_EEEFK1H100UR 139.855,107.008 r0 top value=10u
C25 "Comment" CAP_EEEFK1A220AR#1 129.975,100.598 r0 top value=22u
C26 "Comment" C_0402_1005Metric#1 438.206,84.11 r90 top value=4n7
C27 "Comment" C_0805_2012Metric#2 435.285,78.812 r270 top value=22u
C28 "Comment" C_0805_2012Metric#2 444.683,78.395 r90 top value=22u
C29 "Comment" C_0603_1608Metric#2 442.778,81.57 r270 top value=3u3
C30 "Comment" C_0402_1005Metric#1 437.19,84.11 r90 top value=4n7
C31 "Comment" C_0402_1005Metric#1 439.222,84.11 r270 top value=4n7
C32 "Comment" CAP_EEEFK1A220AR#2 426.014,79.71 r270 top value=22u
C33 "Comment" C_0402_1005Metric#2 436.936,77.252 r90 top value=47n
C34 "Comment" CAP_EEEFK1A220AR#2 453.954,73.016 r90 top value=22u
C35 "Comment" C_0402_1005Metric#2 443.032,75.192 r90 top value=47n
C36 "Comment" C_0402_1005Metric#2 436.936,75.22 r90 top value=47n
C37 "Comment" CAP_EEEFK1A220AR#2 426.014,72.807 r90 top value=22u
C38 "Comment" C_0402_1005Metric#1 441,67.194 r90 top value=4n7
C39 "Comment" C_0402_1005Metric#1 437.952,67.194 r90 top value=4n7
C40 "Comment" C_0402_1005Metric#1 443.794,67.202 r270 top value=4n7
C41 "Comment" C_0402_1005Metric#1 435.539,67.194 r270 top value=4n7
C42 "Comment" C_0603_1608Metric#1 386.472,185.74 r0 top value=100n
C43 "Comment" CAP_EEEFTH101XAP 398.029,190.566 r180 top value=100u
C44 "Comment" C_0402_1005Metric#2 394.727,185.613 r270 top value=100n
C45 "Comment" C_0805_2012Metric#1 396.251,184.851 r270 top value=4u7
C46 "Comment" C_0402_1005Metric#1 442.778,67.196 r270 top value=4n7
C47 "Comment" C_0402_1005Metric#1 436.555,67.194 r270 top value=4n7
C48 "Comment" C_0805_2012Metric#1 143.982,93.092 r0 top value=4u7
C49 "Comment" C_0402_1005Metric#2 389.393,189.677 r180 top value=4u7
C50 "Comment" C_0402_1005Metric#1 441.508,70.201 r270 top value=100p
C51 "Comment" C_0402_1005Metric#1 437.698,70.201 r270 top value=100p
C52 "Comment" C_0402_1005Metric#2 391.944,189.694 r0 top value=2u2
C53 "Comment" C_0402_1005Metric#2 143.77,86.968 r0 top value=4u7
C54 "Comment" C_0603_1608Metric#1 111.12,112.308 r0 top value=100n
C55 "Comment" C_0402_1005Metric#2 389.393,191.709 r0 top value=1n
C56 "Comment" C_0402_1005Metric#2 422.002,159.894 r270 top value=100n
C57 "Comment" C_0402_1005Metric#2 420.986,159.894 r90 top value=100n
C58 "Comment" C_0402_1005Metric#1 420.259,157.112 r270 top value=100n
C59 "Comment" C_0402_1005Metric#1 418.884,156.398 r0 top value=100n
C60 "Comment" C_0402_1005Metric#1 418.887,151.953 r0 top value=100n
C61 "Comment" C_0402_1005Metric#1 418.887,150.937 r0 top value=100n
C62 "Comment" C_0402_1005Metric#1 421.046,148.778 r90 top value=100n
C63 "Comment" C_0402_1005Metric#1 427.114,150.15 r180 top value=100n
C64 "Comment" C_0402_1005Metric#2 149.598,133.986 r0 top value=100n
C65 "Comment" C_0402_1005Metric#2 416.033,154.433 r0 top value=100n
C66 "Comment" C_0402_1005Metric#2 416.033,153.417 r0 top value=100n
C67 "Comment" C_0402_1005Metric#2 422.002,145.797 r90 top value=100n
C68 "Comment" C_0402_1005Metric#2 423.018,145.797 r90 top value=100n
C69 "Comment" C_0402_1005Metric#1 426.659,148.775 r90 top value=100n
C70 "Comment" C_0402_1005Metric#1 427.142,156.246 r0 top value=100n
C71 "Comment" C_0402_1005Metric#1 423.18,157.112 r270 top value=100n
C72 "Comment" C_0402_1005Metric#1 424.348,148.778 r90 top value=100n
C73 "Comment" C_0402_1005Metric#1 427.145,155.23 r180 top value=100n
C74 "Comment" C_0402_1005Metric#1 424.145,157.112 r270 top value=100n
C75 "Comment" C_0402_1005Metric#2 430.13,152.909 r0 top value=100n
C76 "Comment" C_0402_1005Metric#2 430.13,153.925 r180 top value=100n
C77 "Comment" C_0805_2012Metric#1 451.322,156.453 r90 top value=10u
C78 "Comment" C_0603_1608Metric#1 449.29,156.58 r90 top value=0u47
C79 "Comment" C_0402_1005Metric#2 449.011,158.993 r90 top value=100n
C80 "Comment" C_0603_1608Metric#1 441.797,156.961 r270 top value=0u47
C81 "Comment" C_0805_2012Metric#1 439.511,156.707 r270 top value=10u
C82 "Comment" C_0402_1005Metric#2 140.13,158.978 r0 top value=100n
C83 "Comment" C_0402_1005Metric#2 140.13,156.468 r0 top value=100n
C84 "Comment" C_0402_1005Metric#2 140.13,153.958 r0 top value=100n
C85 "Comment" C_0402_1005Metric#2 140.13,151.448 r0 top value=100n
C86 "Comment" C_0402_1005Metric#2 144.14,171.528 r0 top value=100n
C87 "Comment" C_0402_1005Metric#2 144.14,169.018 r0 top value=100n
C88 "Comment" C_0402_1005Metric#2 430.063,149.607 r90 top value=100n
C89 "Comment" C_0402_1005Metric#2 431.079,149.607 r90 top value=100n
C90 "Comment" C_0805_2012Metric#1 445.607,162.803 r180 top value=1u
C91 "Comment" C_0805_2012Metric#1 450.179,151.119 r90 top value=47u
C92 "Comment" C_0805_2012Metric#1 450.181,147.321 r270 top value=47u
C93 "Comment" C_0805_2012Metric#1 441.035,151.053 r90 top value=47u
C94 "Comment" C_0805_2012Metric#1 441.035,147.321 r270 top value=47u
C95 "Comment" C_0402_1005Metric#2 468.114,54.23 r0 top value=22p
C96 "Comment" C_1206_3216Metric 95.168,200.004 r0 top value=22u
C96 "Comment" C_0402_1005Metric#2 467.86,47.626 r180 top value=22p
C97 "Comment" C_1206_3216Metric 58.335,38.228 r0 top value=22u
C98 "Comment" C_1206_3216Metric 58.335,34.878 r0 top value=22u
C98 "Comment" C_1206_3216Metric 95.93,194.368 r0 top value=22u
C99 "Comment" C_0805_2012Metric#1 90.88,197.888 r0 top value=1u
C100 "Comment" C_0402_1005Metric#2 470.626,23.242 r0 top value=10n
C101 "Comment" C_0402_1005Metric#2 470.626,21.972 r0 top value=10n
C102 "Comment" C_0402_1005Metric#2 470.626,19.432 r0 top value=10n
C103 "Comment" C_0402_1005Metric#2 470.626,18.162 r0 top value=10n
C104 "Comment" C_0805_2012Metric#1 90.88,194.878 r0 top value=1u
C105 "Comment" C_1206_3216Metric 470.372,89.282 r270 top value=22u
C106 "Comment" C_1206_3216Metric 95.93,191.018 r0 top value=22u
C107 "Comment" C_0603_1608Metric#1 64.78,198.138 r0 top value=1u
C108 "Comment" C_0402_1005Metric#2 470.372,67.692 r0 top value=10n
C109 "Comment" C_0402_1005Metric#2 453.354,54.357 r180 top value=100n
C110 "Comment" C_0402_1005Metric#2 461.736,61.215 r90 top value=100n
C111 "Comment" C_0402_1005Metric#2 465.165,56.008 r0 top value=100n
C112 "Comment" C_0402_1005Metric#2 64.78,188.098 r0 top value=100n
C113 "Comment" C_0402_1005Metric#2 470.372,66.422 r0 top value=10n
C114 "Comment" C_0402_1005Metric#2 470.372,63.882 r0 top value=10n
C115 "Comment" C_0402_1005Metric#2 470.372,62.612 r0 top value=10n
C116 "Comment" C_0402_1005Metric#2 64.78,185.588 r0 top value=100n
C117 "Comment" C_0402_1005Metric#2 64.78,183.078 r0 top value=100n
C118 "Comment" C_0402_1005Metric#2 90.88,191.868 r0 top value=1u
C119 "Comment" C_0402_1005Metric#2 90.88,188.858 r0 top value=1u
C119 "Comment" C_0402_1005Metric#2 101.17,140.288 r0 top value=10n
C120 "Comment" C_0402_1005Metric#2 101.17,138.318 r0 top value=10n
C120 "Comment" C_0402_1005Metric#2 64.78,180.568 r0 top value=100n
C121 "Comment" C_0402_1005Metric#2 68.79,198.138 r0 top value=100n
C122 "Comment" C_0402_1005Metric#2 90.88,185.848 r0 top value=1u
C123 "Comment" C_0402_1005Metric#2 68.79,195.628 r0 top value=100n
C123 "Comment" C_0402_1005Metric#2 101.17,132.408 r0 top value=10n
C124 "Comment" C_0402_1005Metric#2 104.04,140.288 r0 top value=10n
C124 "Comment" C_0402_1005Metric#2 101.17,136.348 r0 top value=22p
C125 "Comment" C_1206_3216Metric 86.66,139.598 r0 top value=22u
C125 "Comment" C_0402_1005Metric#2 101.17,134.378 r0 top value=22p
C126 "Comment" C_1206_3216Metric 86.66,136.248 r0 top value=22u
C126 "Comment" C_1206_3216Metric 59.605,81.408 r0 top value=22u
C127 "Comment" C_1206_3216Metric 59.605,78.058 r0 top value=22u
C128 "Comment" C_0805_2012Metric#1 81.61,139.768 r0 top value=1u
C129 "Comment" C_0402_1005Metric#2 55.345,82.098 r0 top value=10n
C129 "Comment" C_0402_1005Metric#2 104.04,138.318 r0 top value=10n
C130 "Comment" C_0402_1005Metric#2 55.345,80.128 r0 top value=10n
C130 "Comment" C_0402_1005Metric#2 104.04,136.348 r0 top value=10n
C131 "Comment" C_0402_1005Metric#2 104.04,134.378 r0 top value=10n
C131 "Comment" C_0402_1005Metric#2 55.345,78.158 r0 top value=10n
C132 "Comment" C_0402_1005Metric#2 104.04,132.408 r0 top value=10n
C132 "Comment" C_0402_1005Metric#2 55.345,76.188 r0 top value=10n
C133 "Comment" C_0805_2012Metric#1 81.61,136.758 r0 top value=1u
C134 "Comment" C_1206_3216Metric 59.605,74.708 r0 top value=22u
C134 "Comment" C_1206_3216Metric 86.66,132.898 r0 top value=22u
C135 "Comment" C_0603_1608Metric#1 55.51,140.018 r0 top value=1u
C135 "Comment" C_1206_3216Metric 86.66,129.548 r0 top value=22u
C136 "Comment" C_1206_3216Metric 59.605,71.358 r0 top value=22u
C137 "Comment" C_0603_1608Metric#1 55.51,137.508 r0 top value=100n
C138 "Comment" C_0603_1608Metric#1 55.51,134.998 r0 top value=100n
C139 "Comment" C_0603_1608Metric#1 55.51,132.488 r0 top value=100n
C140 "Comment" C_0603_1608Metric#1 55.51,129.978 r0 top value=100n
C141 "Comment" C_0402_1005Metric#2 55.345,74.218 r0 top value=10n
C142 "Comment" C_0402_1005Metric#2 55.345,72.248 r0 top value=10n
C143 "Comment" C_0402_1005Metric#2 55.345,70.278 r0 top value=10n
C144 "Comment" C_0402_1005Metric#2 55.345,68.308 r0 top value=10n
C145 "Comment" C_0603_1608Metric#1 55.51,127.468 r0 top value=100n
C146 "Comment" C_0603_1608Metric#1 55.51,124.958 r0 top value=100n
C147 "Comment" C_0805_2012Metric#1 81.61,133.748 r0 top value=1u
C148 "Comment" C_0805_2012Metric#1 81.61,130.738 r0 top value=1u
C149 "Comment" C_0603_1608Metric#1 55.51,122.448 r0 top value=100n
C150 "Comment" C_0603_1608Metric#1 59.52,140.018 r0 top value=100n
C151 "Comment" C_0805_2012Metric#1 81.61,127.728 r0 top value=1u
C152 "Comment" C_0603_1608Metric#1 59.52,137.508 r0 top value=100n
C153 "Comment" C_0402_1005Metric#2 134.77,210.408 r0 top value=0u01
C154 "Comment" C_0603_1608Metric#1 138.58,229.648 r0 top value=100n
C155 "Comment" C_0402_1005Metric#2 134.77,208.438 r0 top value=22p
C156 "Comment" C_0402_1005Metric#2 134.77,206.468 r0 top value=22p
C157 "Comment" C_0603_1608Metric#1 138.58,227.138 r0 top value=100n
C158 "Comment" C_0603_1608Metric#1 138.58,224.628 r0 top value=100n
C159 "Comment" C_0402_1005Metric#2 134.77,204.498 r0 top value=0u01
D1 "Comment" LED_0603_1608Metric 49.5,141.898 r0 top value="LED Green"
D2 "Comment" LED_0603_1608Metric 49.5,139.308 r0 top value="LED Red"
D3 "Comment" LED_0603_1608Metric 425.198,192.914 r0 top value="LED Green"
D4 "Comment" SMBJ12A 427.446,186.868 r270 top value=D_TVS
D5 "Comment" SMBJ5.0A 427.446,186.868 r270 top value=D_TVS
D6 "Comment" LED_0603_1608Metric 416.245,192.914 r0 top value="LED Green"
D7 "Comment" LED_0603_1608Metric 119.77,86.578 r0 top value="LED Green"
D8 "Comment" LED_0603_1608Metric 119.77,83.988 r0 top value="LED Green"
D9 "Comment" LED_0603_1608Metric 119.77,81.398 r0 top value="LED Green"
D10 "Comment" LED_0603_1608Metric 130.037,155.472 r0 top value="LED Green"
D11 "Comment" LED_0603_1608Metric 130.037,152.882 r0 top value="LED Green"
D12 "Comment" LED_0603_1608Metric 130.037,150.292 r0 top value="LED Green"
D13 "Comment" LED_0603_1608Metric 130.037,147.702 r0 top value="LED Green"
D14 "Comment" LED_0603_1608Metric 95.15,184.698 r0 top value="LED Green"
D15 "Comment" LED_0603_1608Metric 95.15,182.108 r0 top value="LED Green"
D16 "Comment" LED_0603_1608Metric 95.15,179.518 r0 top value="LED Green"
D17 "Comment" LED_0603_1608Metric 95.15,176.928 r0 top value="LED Green"
D18 "Comment" LED_0603_1608Metric 85.88,126.578 r0 top value="LED Green"
D19 "Comment" LED_0603_1608Metric 85.88,123.988 r0 top value="LED Green"
D20 "Comment" LED_0603_1608Metric 85.88,121.398 r0 top value="LED Green"
D21 "Comment" LED_0603_1608Metric 85.88,118.808 r0 top value="LED Green"
F1 "Comment" RGEF1200 431.978,180.02 r90 top value=Polyfuse
F2 "Comment" RGEF1200 437.25,180.02 r90 top value=Polyfuse
G*** "Comment" F.SilkS_g8 382.07,14.148 r90 top value=LOGO
GND1 "Comment" TestPoint_Pad_1.0x1.0mm 451.068,178.436 r0 top value=TestPoint
H1 "Comment" MountingHole_2.7mm_M2.5 382.07,5.258 r0 top value=MountingHole
H2 "Comment" MountingHole_2.7mm_M2.5 474.36,5.258 r0 top value=MountingHole
H3 "Comment" MountingHole_2.7mm_M2.5 474.36,190.628 r90 top value=MountingHole
H4 "Comment" MountingHole_2.7mm_M2.5 381.98,190.628 r0 top value=MountingHole
H5 "Comment" MountingHole_2.7mm_M2.5 111.47,245.238 r0 top value=MountingHole
IC1 "Comment" VQFN-40-1EP_6x6mm_P0.5mm_EP3.5x3.5mm_ThermalVias 439.992,76.228 r90 top value=TPS65251-1RHAR
IC2 "Comment" MAX20008AFOCVYT 391.044,185.994 r0 top value=MAX20008AFOC_VY+T
IC3 "Comment" LM62460QRPHRQ1 445.55,158.238 r180 top value=LM61480Q3RPHRQ1
IC4 "Comment" QFN50P600X600X100-37N-D 122.51,207.268 r0 top value=USB2512B-AEZG
J1 "Comment" AMPHENOL_10029449-111RLF 413.82,3.98 r0 top value=HDMI_A
J2 "Comment" Hirose_FH12-22S-0.5SH_1x22-1MP_P0.50mm_Horizontal 473.068,37.808 r270 top value=Conn_01x22_Female
J3 "Comment" RJ45_UDE_RB1-125B8G1A 389.055,20.42 r0 top value=RJ45_RB1-125B8G1A
J4 "Comment" JST_GH_SM07B-GHS-TB_1x07-1MP_P1.25mm_Horizontal 474.69,22.403 r270 top value=Conn_01x07
J5 "Comment" DM3ATSFPEJM5 450.65,10.54 r0 top value=Micro_SD_Card_Det
J6 "Comment" SPARKFUN_PRT-14417 474.789,63.634 r270 top value=Conn_01x04
J7 "Comment" PinHeader_2x07_P2.54mm_Vertical 93.685,45.848 r0 top value=Conn_02x07_Odd_Even
J8 "Comment" JST_SH_BM04B-SRSS-TB_1x04-1MP_P1.00mm_Vertical 464.39,5.313 r0 top value=JST_SHBM04B-SRSS-TB
J9 "Comment" JST_SH_BM04B-SRSS-TB_1x04-1MP_P1.00mm_Vertical 396.966,178.944 r0 top value=JST_SHBM04B-SRSS-TB
J10 "Comment" JST_GH_BM02B-GHS-TBT_1x02-1MP_P1.25mm_Vertical 69.495,58.418 r0 top value=Conn_01x02
J11 "Comment" JST_SH_BM04B-SRSS-TB_1x04-1MP_P1.00mm_Vertical 116.042,151.766 r0 top value=JST_SHBM04B-SRSS-TB
J12 "Comment" JST_SH_BM04B-SRSS-TB_1x04-1MP_P1.00mm_Vertical 382.179,181.968 r90 top value=JST_SHBM04B-SRSS-TB
J13 "Comment" 4DBP10803 446.84,191.002 r0 top value=4DB-P108-03
J14 "Comment" 21991195#1 441.044,168.498 r180 top value=Bus_M.2_Socket_M
J15 "Comment" 21991195#2 391.474,168.495 r0 top value=Bus_M.2_Socket_M
J16 "Comment" 21991195#2 424.514,168.498 r0 top value=Bus_M.2_Socket_M
J17 "Comment" 21991195#1 407.604,168.495 r180 top value=Bus_M.2_Socket_M
J18 "Comment" 87713-1001 475.182,32.833 r90 top value=0877131001
J19 "Comment" 87713-1001 475.182,77.217 r90 top value=0877131001
J20 "Comment" 87713-1001 475.182,120.905 r90 top value=0877131001
J21 "Comment" 87713-1001 475.198,164.643 r90 top value=0877131001
J22 "Comment" USB_A_Wuerth_61400826021_Horizontal_Stacked 428.1,16.11 r0 top value=USB_A_Stacked
JP1 "Comment" PinHeader_1x03_P2.54mm_Vertical 101.05,186.848 r0 top value=3P_JUMPER
JP2 "Comment" PinHeader_1x03_P2.54mm_Vertical 105.64,186.848 r0 top value=3P_JUMPER
JP3 "Comment" PinHeader_1x03_P2.54mm_Vertical 91.78,128.728 r0 top value=3P_JUMPER
JP4 "Comment" PinHeader_1x03_P2.54mm_Vertical 96.37,128.728 r0 top value=3P_JUMPER
L1 "Comment" INDPM5050X400N 431.348,79.71 r90 top value=4u7
L2 "Comment" INDPM5050X400N 448.62,73.016 r270 top value=4u7
L3 "Comment" INDPM5050X400N 431.348,72.807 r270 top value=4u7
L4 "Comment" SRN5040TA1R0M 389.139,179.114 r270 top value=1u
L5 "Comment" SRN50402R2Y 445.607,151.119 r270 top value=2u2
Module1 "Comment" Raspberry-Pi-5-Compute-Module 384.84,33.298 r0 top value=ComputeModule5-CM5
Q1 "Comment" BSS84AKW115 45.255,134.543 r0 top value=PMOS
Q2 "Comment" P200_SOT-23 62.505,38.708 r0 top value=NPN
Q2 "Comment" P200_SOT-23 85.11,198.198 r0 top value=NPN
Q3 "Comment" SOT95P237X117-3N 81.29,197.098 r0 top value=PMOS
Q4 "Comment" P200_SOT-23 85.11,193.748 r0 top value=NPN
Q5 "Comment" SOT95P237X117-3N 81.29,192.508 r0 top value=PMOS
Q6 "Comment" SOT95P237X117-3N 81.29,187.918 r0 top value=PMOS
Q7 "Comment" P200_SOT-23 85.11,189.298 r0 top value=NPN
Q8 "Comment" SOT95P237X117-3N 81.29,183.328 r0 top value=PMOS
Q9 "Comment" P200_SOT-23 85.11,184.848 r0 top value=NPN
Q10 "Comment" P200_SOT-23 63.775,81.888 r0 top value=NPN
Q10 "Comment" P200_SOT-23 75.84,140.078 r0 top value=NPN
Q11 "Comment" SOT95P237X117-3N 72.02,138.978 r0 top value=PMOS
Q12 "Comment" P200_SOT-23 75.84,135.628 r0 top value=NPN
Q13 "Comment" SOT95P237X117-3N 72.02,134.388 r0 top value=PMOS
Q14 "Comment" SOT95P237X117-3N 72.02,129.798 r0 top value=PMOS
Q15 "Comment" P200_SOT-23 75.84,126.728 r0 top value=NPN
Q15 "Comment" P200_SOT-23 75.84,131.178 r0 top value=NPN
Q16 "Comment" SOT95P237X117-3N 72.02,125.208 r0 top value=PMOS
Q17 "Comment" P200_SOT-23 63.775,77.438 r0 top value=NPN
R1 "Comment" R_0603_1608Metric#1 48.17,129.638 r0 top value=1K
R2 "Comment" R_0603_1608Metric#1 48.17,127.128 r0 top value=1K
R3 "Comment" R_0603_1608Metric#1 48.17,124.618 r0 top value=1K
R4 "Comment" R_0603_1608Metric#1 48.17,122.108 r0 top value=1k
R5 "Comment" R_0603_1608Metric#1 48.17,119.598 r0 top value=4K7
R6 "Comment" R_0603_1608Metric#1 48.17,117.088 r0 top value=4K7
R7 "Comment" R_0805_2012Metric_Pad1.20x1.40mm_HandSolder 45.08,141.718 r0 top value=0R
R8 "Comment" R_0805_2012Metric_Pad1.20x1.40mm_HandSolder 45.08,138.768 r0 top value=nf
R9 "Comment" R_0603_1608Metric#1 428.246,192.914 r0 top value=2K2
R10 "Comment" R_0603_1608Metric#1 419.293,192.914 r0 top value=620
R11 "Comment" R_0402_1005Metric#1 438.206,82.205 r90 top value=20k
R12 "Comment" R_0603_1608Metric#2 432.745,68.499 r0 top value=10K
R13 "Comment" R_0402_1005Metric#1 441.254,84.11 r90 top value=80K6
R14 "Comment" R_0402_1005Metric#1 436.174,84.11 r90 top value=150k
R15 "Comment" R_0402_1005Metric#1 440.238,84.11 r270 top value=40K2
R16 "Comment" R_0603_1608Metric#1 115.13,114.818 r0 top value=270
R17 "Comment" R_0603_1608Metric#1 115.13,112.308 r0 top value=270
R18 "Comment" R_0603_1608Metric#1 115.13,109.798 r0 top value=1K
R19 "Comment" R_0402_1005Metric#1 439.984,67.198 r90 top value=40K2
R20 "Comment" R_0402_1005Metric#1 438.968,67.194 r90 top value=40K2
R21 "Comment" R_0603_1608Metric#2 444.81,69.742 r270 top value=120k
R22 "Comment" R_0603_1608Metric#1 439.095,71.111 r0 top value=150k
R23 "Comment" R_0603_1608Metric#2 386.409,187.264 r0 top value=20K
R24 "Comment" R_0402_1005Metric#1 439.984,69.124 r90 top value=12K7
R25 "Comment" R_0402_1005Metric#1 438.968,69.124 r90 top value=80K6
R26 "Comment" R_0402_1005Metric#1 439.857,71.664 r90 top value=383k
R27 "Comment" R_0603_1608Metric#2 442.778,69.742 r270 top value=20k
R28 "Comment" R_0603_1608Metric#2 436.428,69.742 r270 top value=20k
R29 "Comment" C_0402_1005Metric#2 389.393,190.693 r180 top value=22K
R30 "Comment" R_0603_1608Metric#1 387.107,189.55 r90 top value=12k
R31 "Comment" R_0603_1608Metric#1 144.14,166.508 r0 top value=10K
R32 "Comment" R_0603_1608Metric#1 144.14,163.998 r0 top value=10K
R33 "Comment" R_0603_1608Metric#1 144.14,161.488 r0 top value=10K
R34 "Comment" R_0603_1608Metric#1 144.14,158.978 r0 top value=10K
R35 "Comment" R_0603_1608Metric#1 144.14,156.468 r0 top value=10K
R36 "Comment" R_0402_1005Metric#2 441.543,160.517 r180 top value=10k
R37 "Comment" R_0603_1608Metric#1 144.14,151.448 r0 top value=1K
R38 "Comment" R_0603_1608Metric#1 148.15,171.528 r0 top value=1K
R39 "Comment" R_0603_1608Metric#1 148.15,169.018 r0 top value=1K
R40 "Comment" R_0603_1608Metric#1 148.15,166.508 r0 top value=1K
R41 "Comment" R_0603_1608Metric#1 148.15,163.998 r0 top value=12K1
R42 "Comment" R_0603_1608Metric#1 148.15,161.488 r0 top value=12K1
R43 "Comment" R_0603_1608Metric#1 148.15,158.978 r0 top value=1k
R44 "Comment" R_0603_1608Metric#1 134.048,155.512 r0 top value=1k
R45 "Comment" R_0603_1608Metric#1 134.048,153.002 r0 top value=1k
R46 "Comment" R_0603_1608Metric#1 134.048,150.492 r0 top value=1k
R47 "Comment" R_0603_1608Metric#1 68.79,193.118 r0 top value=12K
R48 "Comment" R_0603_1608Metric#1 68.055,38.648 r0 top value=100K
R49 "Comment" R_0603_1608Metric#1 68.79,190.608 r0 top value=100K
R49 "Comment" R_0603_1608Metric#1 68.79,188.098 r0 top value=100K
R50 "Comment" R_0603_1608Metric#1 68.79,185.588 r0 top value=100K
R51 "Comment" R_0603_1608Metric#1 68.79,183.078 r0 top value=100K
R52 "Comment" R_0603_1608Metric#1 68.79,180.568 r0 top value=12K
R53 "Comment" R_0603_1608Metric#1 72.8,198.138 r0 top value=4K7
R54 "Comment" R_0603_1608Metric#1 72.8,195.628 r0 top value=100K
R55 "Comment" R_0603_1608Metric#1 72.8,190.608 r0 top value=100K
R56 "Comment" R_0603_1608Metric#1 72.8,188.098 r0 top value=100K
R57 "Comment" R_0603_1608Metric#1 72.8,185.588 r0 top value=10
R58 "Comment" R_0603_1608Metric#1 72.8,183.078 r0 top value=4K7
R59 "Comment" R_0603_1608Metric#1 72.8,180.568 r0 top value="4K7 1%"
R60 "Comment" R_0603_1608Metric#1 72.8,193.118 r0 top value=100K
R61 "Comment" R_0603_1608Metric#1 76.81,198.138 r0 top value=270
R62 "Comment" R_0603_1608Metric#1 76.81,195.628 r0 top value=270
R63 "Comment" R_0603_1608Metric#1 76.81,193.118 r0 top value=270
R64 "Comment" R_0603_1608Metric#1 76.81,190.608 r0 top value=270
R65 "Comment" R_0603_1608Metric#1 59.52,134.998 r0 top value=12K
R66 "Comment" R_0603_1608Metric#1 64.435,72.928 r0 top value=100K
R67 "Comment" R_0603_1608Metric#1 59.52,132.488 r0 top value=100K
R67 "Comment" R_0603_1608Metric#1 59.52,129.978 r0 top value=100K
R68 "Comment" R_0603_1608Metric#1 59.52,127.468 r0 top value=100K
R69 "Comment" R_0603_1608Metric#1 59.52,124.958 r0 top value=100K
R70 "Comment" R_0603_1608Metric#1 59.52,122.448 r0 top value=4K7
R71 "Comment" R_0603_1608Metric#1 63.53,140.018 r0 top value=12K
R72 "Comment" R_0603_1608Metric#1 63.53,137.508 r0 top value=100K
R73 "Comment" R_0603_1608Metric#1 63.53,132.488 r0 top value=100K
R74 "Comment" R_0603_1608Metric#1 63.53,129.978 r0 top value=100K
R74 "Comment" R_0603_1608Metric#1 63.53,134.998 r0 top value=100K
R75 "Comment" R_0603_1608Metric#1 63.53,127.468 r0 top value=10
R76 "Comment" R_0603_1608Metric#1 63.53,124.958 r0 top value=4K7
R77 "Comment" R_0603_1608Metric#1 63.53,122.448 r0 top value="4K7 1%"
R78 "Comment" R_0603_1608Metric#1 64.435,70.418 r0 top value=100K
R79 "Comment" R_0603_1608Metric#1 67.54,140.018 r0 top value=270
R80 "Comment" R_0603_1608Metric#1 67.54,137.508 r0 top value=270
R81 "Comment" R_0603_1608Metric#1 67.54,134.998 r0 top value=270
R82 "Comment" R_0603_1608Metric#1 67.54,132.488 r0 top value=270
R83 "Comment" R_0603_1608Metric#1 138.58,222.118 r0 top value=1K
R84 "Comment" R_0603_1608Metric#1 138.58,219.608 r0 top value=330
R85 "Comment" R_0603_1608Metric#1 138.58,217.098 r0 top value=12K
REF** "Comment" OSHW-Symbol_6.7x6mm_SilkScreen 382.07,24.308 r90 top value=OSHW-Symbol_6.7x6mm_SilkScreen
TP1 "Comment" TestPoint_Pad_1.0x1.0mm 49.33,135.768 r0 top value=TestPoint
TP2 "Comment" TestPoint_Pad_1.0x1.0mm 49.33,132.718 r0 top value=TestPoint
TP3 "Comment" TestPoint_Pad_1.0x1.0mm 126.68,108.738 r0 top value=TestPoint
TP4 "Comment" TestPoint_Pad_1.0x1.0mm 129.73,108.738 r0 top value=TestPoint
TP5 "Comment" TestPoint_Pad_1.0x1.0mm 129.73,105.688 r0 top value=TestPoint
TP6 "Comment" TestPoint_Pad_1.0x1.0mm 132.78,108.738 r0 top value=TestPoint
TP7 "Comment" TestPoint_Pad_1.0x1.0mm 132.78,105.688 r0 top value=TestPoint
U1 "Comment" TSOT-23_HandSoldering 407.439,14.54 r0 top value=RT9742SNGV
U2 "Comment" USON-10_2.5x1.0mm_P0.5mm 397.31,23.923 r270 top value=TPD4EUSB30
U3 "Comment" USON-10_2.5x1.0mm_P0.5mm 391.46,23.923 r270 top value=TPD4EUSB30
U4 "Comment" SOT-353_SC-70-5 1.6,117.923 r0 top value=74LVC1G07SE-7
U5 "Comment" SOT-23-5 23.44,120.243 r0 top value=RT9742GGJ5
U6 "Comment" SOT-223-3_TabPin2 130.08,114.383 r0 top value=AMS1117-3.3
U7 "Comment" Crystal_SMD_3225-4Pin_3.2x2.5mm 149.908,137.376 r0 top value=ASEK-32.768KHZ-L-R-T
U8 "Comment" QFN-64-1EP_9x9mm_P0.5mm_EP5.2x5.2mm_ThermalVias 423.033,152.924 r270 top value=ASM1184
U9 "Comment" SOIC-8_3.9x4.9mm_P1.27mm 446.75,50.928 r90 top value=W25X40CLSN
U10 "Comment" QFN-64-1EP_8x8mm_P0.4mm_EP6.5x6.5mm_ThermalVias 459.48,54.962 r0 top value=JMS561
U11 "Comment" SOIC-8_3.9x4.9mm_P1.27mm 102.89,127.668 r0 top value=W25X40CLSN
U12 "Comment" QFN-64-1EP_8x8mm_P0.4mm_EP6.5x6.5mm_ThermalVias 94.61,136.148 r0 top value=JMS561
Y1 "Comment" ABM810000MHZ12D2W#1 468.086,50.928 r270 top value=30MHz
Y2 "Comment" ABM810000MHZ12D2W#1 102.015,121.443 r0 top value=30MHz
Y3 "Comment" ABM810000MHZ12D2W#2 129.985,208.393 r0 top value=30MHz

## Footprints (in the part's own frame and the unit in brackets; to place one, negate y for a bottom-side part, rotate by r counter-clockwise, add the part's x,y. Pads: shape width x height; smd on the part's side, far side on the other; paste and mask are expansions set on the pad)
4DBP10803 [mil]
  rect 107.99x107.99 hole 72 paste-99999 mask-107.99: 1(0,0)
  round 107.99 hole 72 paste-99999 mask-107.99: 2(325,0) 3(650,0)
  F.SilkS lines w10: 0,110.24 ccw(c0,112.2) 0,114.17 ; 0,110.24 cw(c0,112.2) 0,114.17 ; 0,110.24 cw(c0,112.2) 0,114.17 ; -200,-409.45 840,-409.45 840,90 -200,90 -200,-409.45
  F.CrtYd lines w10: -239.37,-449.37 879.37,-449.37 879.37,129.37 -239.37,129.37 -239.37,-449.37
87713-1001 [mm]
  rect 0.85x4 smd paste-4 mask-4: 1(-15.875,1) 2(-14.605,1) 3(-13.335,1) 4(-12.065,1) 5(-10.795,1) 6(-9.525,1) 7(-8.255,1) 8(-1.905,1) 9(-0.635,1) 10(0.635,1) 11(1.905,1) 12(3.175,1) 13(4.445,1) 14(5.715,1) 15(6.985,1) 16(8.255,1) 17(9.525,1) 18(10.795,1) 19(12.065,1) 20(13.335,1) 21(14.605,1) 22(15.875,1)
  round 2.38 hole 2.38 paste-2539.97 mask-2.38: Un1(-19.365,0)
  round 2.68 hole 2.68 paste-2539.97 mask-2.68: Un2(19.365,0)
  F.SilkS lines w0.254: -16.86,3 -21.365,3 -21.365,-3 21.365,-3 21.365,3 16.789,3
21991195#1 [mm]
  rect 0.3x1.55 on Mid2 paste-1.55 mask-1.55: 1(-9.25,-3.775) 2(-9,3.775) 3(-8.75,-3.775) 4(-8.5,3.775) 5(-8.25,-3.775) 6(-8,3.775) 7(-7.75,-3.775) 8(-7.5,3.775) 9(-7.25,-3.775) 10(-7,3.775) 11(-6.75,-3.775) 20(-4.5,3.775) 21(-4.25,-3.775) 22(-4,3.775) 23(-3.75,-3.775) 24(-3.5,3.775) 25(-3.25,-3.775) 26(-3,3.775) 27(-2.75,-3.775) 28(-2.5,3.775) 29(-2.25,-3.775) 30(-2,3.775) 31(-1.75,-3.775) 32(-1.5,3.775) 33(-1.25,-3.775) 34(-1,3.775) 35(-0.75,-3.775) 36(-0.5,3.775) 37(-0.25,-3.775) 38(0,3.775) 39(0.25,-3.775) 40(0.5,3.775) 41(0.75,-3.775) 42(1,3.775) 43(1.25,-3.775) 44(1.5,3.775) 45(1.75,-3.775) 46(2,3.775) 47(2.25,-3.775) 48(2.5,3.775) 49(2.75,-3.775) 50(3,3.775) 51(3.25,-3.775) 52(3.5,3.775) 53(3.75,-3.775) 54(4,3.775) 55(4.25,-3.775) 56(4.5,3.775) 57(4.75,-3.775) 58(5,3.775) 59(5.25,-3.775) 60(5.5,3.775) 61(5.75,-3.775) 62(6,3.775) 63(6.25,-3.775) 64(6.5,3.775) 65(6.75,-3.775) 66(7,3.775) 67(7.25,-3.775) 68(7.5,3.775) 69(7.75,-3.775) 70(8,3.775) 71(8.25,-3.775) 72(8.5,3.775) 73(8.75,-3.775) 74(9,3.775) 75(9.25,-3.775)
  rect 1.2x2.75 on Mid2 paste-2.75 mask-2.75: 76(-10.35,-3) 77(10.35,-3)
  round 5.8 hole 3.7 paste-2539.97 mask-5.8: M1(0,29.75) M2(0,41.75) M3(0,59.75) M4(0,79.75)
  round 1.15 hole 1.15 paste-2539.97 mask-1.15: Un1(-10,1.5)
  round 1.65 hole 1.65 paste-2539.97 mask-1.65: Un2(10,1.5)
  B.SilkS lines w0.254: 11.5,59.75 4,59.75 ; 11.5,41.75 4,41.75 ; 11.5,29.75 4,29.75 ; 11.5,1.5 11.5,79.75 4,79.75 ; -4,79.75 -11.5,79.75 -11.5,1.5 ; -4,59.75 -11.5,59.75 ; -4,41.75 -11.5,41.75 ; -4,29.75 -11.5,29.75 ; 10.95,4.35 9.75,4.35 10.95,4.35 ; 10.95,4.35 10.95,3 10.95,4.35 ; -9.25,-5.3 ccw(c-9.25,-5.35) -9.25,-5.4 ; -9.25,-5.3 ccw(c-9.25,-5.35) -9.25,-5.4 ; -9.25,-5.3 cw(c-9.25,-5.35) -9.25,-5.4 ; -9.25,-5.3 -9.25,-5.4 ; -10.95,4.35 -10.95,2.75 -10.95,4.35 ; -10.95,4.35 -9.75,4.35 -10.95,4.35 ; 10.95,0 10.95,-1 10.95,0 ; -5,-4.35 -6,-4.35 -5,-4.35 ; -5.25,4.35 -6.25,4.35 -5.25,4.35 ; -10.95,0.25 -10.95,-1 -10.95,0.25
  B.CrtYd lines w0.254: 11.95,5.55 -11.95,5.55 -11.95,-6.4 11.95,-6.4 11.95,5.55
21991195#2 [mm]
  rect 0.3x1.55 smd paste-1.55 mask-1.55: 1(-9.25,3.775) 2(-9,-3.775) 3(-8.75,3.775) 4(-8.5,-3.775) 5(-8.25,3.775) 6(-8,-3.775) 7(-7.75,3.775) 8(-7.5,-3.775) 9(-7.25,3.775) 10(-7,-3.775) 11(-6.75,3.775) 20(-4.5,-3.775) 21(-4.25,3.775) 22(-4,-3.775) 23(-3.75,3.775) 24(-3.5,-3.775) 25(-3.25,3.775) 26(-3,-3.775) 27(-2.75,3.775) 28(-2.5,-3.775) 29(-2.25,3.775) 30(-2,-3.775) 31(-1.75,3.775) 32(-1.5,-3.775) 33(-1.25,3.775) 34(-1,-3.775) 35(-0.75,3.775) 36(-0.5,-3.775) 37(-0.25,3.775) 38(0,-3.775) 39(0.25,3.775) 40(0.5,-3.775) 41(0.75,3.775) 42(1,-3.775) 43(1.25,3.775) 44(1.5,-3.775) 45(1.75,3.775) 46(2,-3.775) 47(2.25,3.775) 48(2.5,-3.775) 49(2.75,3.775) 50(3,-3.775) 51(3.25,3.775) 52(3.5,-3.775) 53(3.75,3.775) 54(4,-3.775) 55(4.25,3.775) 56(4.5,-3.775) 57(4.75,3.775) 58(5,-3.775) 59(5.25,3.775) 60(5.5,-3.775) 61(5.75,3.775) 62(6,-3.775) 63(6.25,3.775) 64(6.5,-3.775) 65(6.75,3.775) 66(7,-3.775) 67(7.25,3.775) 68(7.5,-3.775) 69(7.75,3.775) 70(8,-3.775) 71(8.25,3.775) 72(8.5,-3.775) 73(8.75,3.775) 74(9,-3.775) 75(9.25,3.775)
  rect 1.2x2.75 smd paste-2.75 mask-2.75: 76(-10.35,3) 77(10.35,3)
  round 5.8 hole 3.7 paste-2539.97 mask-5.8: M1(0,-29.75) M2(0,-41.75) M3(0,-59.75) M4(0,-79.75)
  round 1.15 hole 1.15 paste-2539.97 mask-1.15: Un1(-10,-1.5)
  round 1.65 hole 1.65 paste-2539.97 mask-1.65: Un2(10,-1.5)
  F.SilkS lines w0.254: -11.5,-59.75 -4,-59.75 ; -11.5,-41.75 -4,-41.75 ; -11.5,-29.75 -4,-29.75 ; -11.5,-1.5 -11.5,-79.75 -4,-79.75 ; 4,-79.75 11.5,-79.75 11.5,-1.5 ; 4,-59.75 11.5,-59.75 ; 4,-41.75 11.5,-41.75 ; 4,-29.75 11.5,-29.75 ; -10.95,-4.35 -9.75,-4.35 -10.95,-4.35 ; -10.95,-4.35 -10.95,-2.75 -10.95,-4.35 ; -9.25,5.3 ccw(c-9.25,5.35) -9.25,5.4 ; -9.25,5.3 cw(c-9.25,5.35) -9.25,5.4 ; -9.25,5.3 cw(c-9.25,5.35) -9.25,5.4 ; 10.95,-4.35 10.95,-3 10.95,-4.35 ; 10.95,-4.35 9.75,-4.35 10.95,-4.35 ; -10.95,-0.25 -10.95,1 -10.95,-0.25 ; -6.25,-4.35 -5.25,-4.35 -6.25,-4.35 ; -6,4.35 -5,4.35 -6,4.35 ; 10.95,0 10.95,1 10.95,0
  F.CrtYd lines w0.254: -11.95,-5.55 11.95,-5.55 11.95,6.4 -11.95,6.4 -11.95,-5.55
ABM810000MHZ12D2W#1 [mm]
  rect 1.3x1.05 smd paste-1.3 mask-1.3: 1(-1.15,-0.925) 2(1.15,-0.925) 3(1.15,0.925) 4(-1.15,0.925)
  F.SilkS region: -0.96,-2.03 -1.44,-2.03 -1.2,-1.7
  F.SilkS lines w0.254: 0.2,-1.25 -0.2,-1.25 ; 0.2,1.25 -0.2,1.25
  F.CrtYd lines w0.254: 2.8,-2.887 2.8,2.45 -2.8,2.45 -2.8,-2.887 2.8,-2.887
ABM810000MHZ12D2W#2 [mm]
  rect 1.3x1.05 smd paste-1.3 mask-1.3: 1(-1.15,-0.925) 2(1.15,-0.925) 3(1.15,0.925) 4(-1.15,0.925)
  F.SilkS lines w0.254: -2.032,1.524 -2.032,-1.854 1.905,-1.854 ; -0.2,-1.25 0.2,-1.25 ; -0.2,1.25 0.2,1.25
  F.CrtYd lines w0.254: -2.8,-2.887 2.8,-2.887 2.8,2.45 -2.8,2.45 -2.8,-2.887
AMPHENOL_10029449-111RLF [mm]
  rect 0.3x1.9 smd paste-1.9 mask-1.9: 1(4.75,5.85) 2(4.25,5.85) 3(3.75,5.85) 4(3.25,5.85) 5(2.75,5.85) 6(2.25,5.85) 7(1.75,5.85) 8(1.25,5.85) 9(0.75,5.85) 10(0.25,5.85) 11(-0.25,5.85) 12(-0.75,5.85) 13(-1.25,5.85) 14(-1.75,5.85) 15(-2.25,5.85) 16(-2.75,5.85) 17(-3.25,5.85) 18(-3.75,5.85) 19(-4.25,5.85)
  round 1.995 hole 1.33 paste-2539.97 mask-1.995: S1(-7.25,4.95) S2(7.25,4.95) S3(-7.85,0) S4(7.85,0)
  F.Mask region: 4.95,4.85 4.55,4.85 4.55,6.85 4.95,6.85
  F.Mask region: 4.45,4.85 4.05,4.85 4.05,6.85 4.45,6.85
  F.Mask region: 3.95,4.85 3.55,4.85 3.55,6.85 3.95,6.85
  F.Mask region: 3.45,4.85 3.05,4.85 3.05,6.85 3.45,6.85
  F.Mask region: 2.95,4.85 2.55,4.85 2.55,6.85 2.95,6.85
  F.Mask region: 2.45,4.85 2.05,4.85 2.05,6.85 2.45,6.85
  F.Mask region: 1.95,4.85 1.55,4.85 1.55,6.85 1.95,6.85
  F.Mask region: 1.45,4.85 1.05,4.85 1.05,6.85 1.45,6.85
  F.Mask region: 0.95,4.85 0.55,4.85 0.55,6.85 0.95,6.85
  F.Mask region: 0.45,4.85 0.05,4.85 0.05,6.85 0.45,6.85
  F.Mask region: -0.05,4.85 -0.45,4.85 -0.45,6.85 -0.05,6.85
  F.Mask region: -0.55,4.85 -0.95,4.85 -0.95,6.85 -0.55,6.85
  F.Mask region: -1.05,4.85 -1.45,4.85 -1.45,6.85 -1.05,6.85
  F.Mask region: -1.55,4.85 -1.95,4.85 -1.95,6.85 -1.55,6.85
  F.Mask region: -2.05,4.85 -2.45,4.85 -2.45,6.85 -2.05,6.85
  F.Mask region: -2.55,4.85 -2.95,4.85 -2.95,6.85 -2.55,6.85
  F.Mask region: -3.05,4.85 -3.45,4.85 -3.45,6.85 -3.05,6.85
  F.Mask region: -3.55,4.85 -3.95,4.85 -3.95,6.85 -3.55,6.85
  F.Mask region: -4.05,4.85 -4.45,4.85 -4.45,6.85 -4.05,6.85
  F.SilkS circle w0.254: c4.75,7.4 r0.1
  F.SilkS lines w0.254: -7.5,-1.35 -7.5,-2.55 7.5,-2.55 7.5,-1.35 ; -7.5,1.35 -7.5,3.6 ; -5.9,5.98 -4.75,5.98 ; 5.25,5.98 5.9,5.98 ; 7.5,1.35 7.5,3.6
  F.CrtYd lines w0.254: -9.1,-3.77 9.1,-3.77 9.1,7.05 -9.1,7.05 -9.1,-3.77
BatteryHolder_Keystone_3034_1x20mm [mm]
  rect 1.27x5.08 on Mid2 paste-5.08 mask-5.08: 1(-10.985,0) 1(10.985,0)
  round 17.8 on Mid2 paste-17.8 mask-17.8: 2(0,0)
  B.SilkS lines w0.254: 5.2,-7.54 8.7,-7.54 10.78,-5.46 10.78,-3 ; -5.2,-7.54 -8.7,-7.54 -10.78,-5.46 -10.78,-3 ; 10.78,3 10.78,3.63 9.34,7.58 9.325,7.588 ccw(c7.31,6.85) 6,8.55 ; -10.78,3 -10.78,3.63 -9.34,7.58 cw(c-7.31,6.85) -6.003,8.567
  Dwgs.User circle w0.254: c0,0 r10.25
  B.CrtYd lines w0.254: 9.415,7.621 ccw(c7.31,6.85) 5.96,8.64 5.945,8.65 ccw(c0,0) -5.96,8.64 -5.957,8.655 ccw(c-7.31,6.85) -9.43,7.62 -9.44,7.62 -10.88,3.64 -10.88,2.79 -11.87,2.79 -11.87,-2.79 -10.88,-2.79 -10.88,-5.5 -8.74,-7.64 -7.2,-7.64 ; 9.43,7.63 10.88,3.64 10.88,2.79 11.87,2.79 11.87,-2.79 10.88,-2.79 10.88,-5.5 8.74,-7.64 7.2,-7.64 cw(c0,0) -7.2,-7.64 ; -7.2,-7.64 -7.2,-7.64
BSS84AKW115 [mm]
  rect 0.6x0.55 smd paste-0.6 mask-0.6: 1(-0.65,-0.925) 2(0.65,-0.925) 3(0,0.925)
  F.SilkS lines w0.254: -1,-0.2 -1,0.625 -0.65,0.625 ; 0.6,0.625 1,0.625 1,-0.2 ; -0.65,-1.7 cw(c-0.65,-1.65) -0.65,-1.6 cw(c-0.65,-1.65) -0.65,-1.7
  F.CrtYd lines w0.254: -2,-2.2 2,-2.2 2,2.2 -2,2.2 -2,-2.2
C_0402_1005Metric#1 [mm]
  rrect25% 0.56x0.62 on Mid2 paste-0.62 mask-0.62: 1(-0.48,0) 2(0.48,0)
  B.SilkS lines w0.254: -0.108,0.36 0.108,0.36 ; -0.108,-0.36 0.108,-0.36
  B.CrtYd lines w0.254: -0.91,0.46 -0.91,-0.46 0.91,-0.46 0.91,0.46 -0.91,0.46
C_0402_1005Metric#2 [mm]
  rrect25% 0.56x0.62 smd paste-0.62 mask-0.62: 1(-0.48,0) 2(0.48,0)
  F.SilkS lines w0.254: -0.108,0.36 0.108,0.36 ; -0.108,-0.36 0.108,-0.36
  F.CrtYd lines w0.254: -0.91,0.46 -0.91,-0.46 0.91,-0.46 0.91,0.46 -0.91,0.46
C_0603_1608Metric#1 [mm]
  rrect25% 0.9x0.95 smd paste-0.95 mask-0.95: 1(-0.775,0) 2(0.775,0)
  F.SilkS lines w0.254: -0.141,-0.51 0.141,-0.51 ; -0.141,0.51 0.141,0.51
  F.CrtYd lines w0.254: -1.48,-0.73 1.48,-0.73 1.48,0.73 -1.48,0.73 -1.48,-0.73
C_0603_1608Metric#2 [mm]
  rrect25% 0.9x0.95 on Mid2 paste-0.95 mask-0.95: 1(-0.775,0) 2(0.775,0)
  B.SilkS lines w0.254: 0.141,-0.51 -0.141,-0.51 ; 0.141,0.51 -0.141,0.51
  B.CrtYd lines w0.254: 1.48,-0.73 1.48,0.73 -1.48,0.73 -1.48,-0.73 1.48,-0.73
C_0805_2012Metric#1 [mm]
  rrect25% 1x1.45 smd paste-1.45 mask-1.45: 1(-0.95,0) 2(0.95,0)
  F.SilkS lines w0.254: -0.261,-0.735 0.261,-0.735 ; -0.261,0.735 0.261,0.735
  F.CrtYd lines w0.254: -1.7,-0.98 1.7,-0.98 1.7,0.98 -1.7,0.98 -1.7,-0.98
C_0805_2012Metric#2 [mm]
  rrect25% 1x1.45 on Mid2 paste-1.45 mask-1.45: 1(-0.95,0) 2(0.95,0)
  B.SilkS lines w0.254: -0.261,0.735 0.261,0.735 ; -0.261,-0.735 0.261,-0.735
  B.CrtYd lines w0.254: -1.7,0.98 -1.7,-0.98 1.7,-0.98 1.7,0.98 -1.7,0.98
C_1206_3216Metric [mm]
  rrect22% 1.15x1.8 smd paste-1.8 mask-1.8: 1(-1.475,0) 2(1.475,0)
  F.SilkS lines w0.254: -0.711,-0.91 0.711,-0.91 ; -0.711,0.91 0.711,0.91
  F.CrtYd lines w0.254: -2.3,-1.15 2.3,-1.15 2.3,1.15 -2.3,1.15 -2.3,-1.15
C_1210_3225Metric#1 [mm]
  rrect22% 1.15x2.7 on Mid2 paste-2.7 mask-2.7: 1(-1.475,0) 2(1.475,0)
  B.SilkS lines w0.254: -0.711,1.36 0.711,1.36 ; -0.711,-1.36 0.711,-1.36
  B.CrtYd lines w0.254: -2.3,1.6 -2.3,-1.6 2.3,-1.6 2.3,1.6 -2.3,1.6
C_1210_3225Metric#2 [mm]
  rrect22% 1.15x2.7 smd paste-2.7 mask-2.7: 1(-1.475,0) 2(1.475,0)
  F.SilkS lines w0.254: -0.711,1.36 0.711,1.36 ; -0.711,-1.36 0.711,-1.36
  F.CrtYd lines w0.254: -2.3,1.6 -2.3,-1.6 2.3,-1.6 2.3,1.6 -2.3,1.6
CAP_EEEFK1A220AR#1 [mm]
  rect 2.5x1.6 smd paste-2.5 mask-2.5: 1(-1.75,0) 2(1.75,0)
  F.SilkS circle w0.254: c-3.35,1.45 r0.1
  F.SilkS lines w0.254: -2.15,-1.12 -2.15,-1.45 -1.45,-2.15 2.15,-2.15 2.15,-1.12 ; -2.15,1.12 -2.15,1.45 -1.45,2.15 2.15,2.15 2.15,1.12
  F.CrtYd lines w0.254: -3.25,-1.05 -3.25,1.05 -2.4,1.05 -2.4,1.575 -1.575,2.4 2.4,2.4 2.4,1.05 3.25,1.05 3.25,-1.05 2.4,-1.05 2.4,-2.4 -1.575,-2.4 -2.4,-1.575 -2.4,-1.05 -3.25,-1.05
CAP_EEEFK1A220AR#2 [mm]
  rect 2.5x1.6 on Mid2 paste-2.5 mask-2.5: 1(-1.75,0) 2(1.75,0)
  B.SilkS circle w0.254: c-3.35,-1.45 r0.1
  B.SilkS lines w0.254: 2.15,-1.12 2.15,-2.15 -1.45,-2.15 -2.15,-1.45 -2.15,-1.12 ; 2.15,1.12 2.15,2.15 -1.45,2.15 -2.15,1.45 -2.15,1.12
  B.CrtYd lines w0.254: 2.4,-2.4 2.4,-1.05 3.25,-1.05 3.25,1.05 2.4,1.05 2.4,2.4 -1.575,2.4 -2.4,1.575 -2.4,1.05 -3.25,1.05 -3.25,-1.05 -2.4,-1.05 -2.4,-1.575 -1.575,-2.4 2.4,-2.4
CAP_EEEFK1H100UR [mm]
  rect 2.8x1.6 smd paste-2.8 mask-2.8: 1(-2.15,0) 2(2.15,0)
  F.SilkS circle w0.254: c-4.15,1.35 r0.1
  F.SilkS lines w0.254: -2.65,-1.12 -2.65,-1.55 -1.55,-2.65 2.65,-2.65 2.65,-1.12 ; -2.65,1.12 -2.65,1.55 -1.55,2.65 2.65,2.65 2.65,1.12
  F.CrtYd lines w0.254: -3.8,-1.05 -3.8,1.05 -2.9,1.05 -2.9,1.675 -1.675,2.9 2.9,2.9 2.9,1.05 3.8,1.05 3.8,-1.05 2.9,-1.05 2.9,-2.9 -1.675,-2.9 -2.9,-1.675 -2.9,-1.05 -3.8,-1.05
CAP_EEEFTH101XAP [mm]
  rect 3.2x1.6 smd paste-3.2 mask-3.2: 1(-2.5,0) 2(2.5,0)
  F.SilkS circle w0.254: c-4.15,1.35 r0.1
  F.SilkS lines w0.254: 3.3,1.12 3.3,3.3 -2.3,3.3 -3.3,2.3 -3.3,1.12 ; 3.3,-1.12 3.3,-3.3 -2.3,-3.3 -3.3,-2.3 -3.3,-1.12
  F.CrtYd lines w0.254: 4.35,1.05 4.35,-1.05 3.55,-1.05 3.55,-3.55 -2.425,-3.55 -3.55,-2.425 -3.55,-1.05 -4.35,-1.05 -4.35,1.05 -3.55,1.05 -3.55,2.425 -2.425,3.55 3.55,3.55 3.55,1.05 4.35,1.05
Crystal_SMD_3225-4Pin_3.2x2.5mm [mm]
  rrect21% 1.4x1.2 smd paste-1.4 mask-1.4: 1(-1.1,-0.85) 2(1.1,-0.85) 3(1.1,0.85) 4(-1.1,0.85)
  F.SilkS region: -0.86,-2.03 -1.34,-2.03 -1.1,-1.7
  F.SilkS lines w0.254: -0.3,-1.4 0.3,-1.4 ; -0.3,1.4 0.3,1.4
  F.CrtYd lines w0.254: -2.1,-1.75 2.1,-1.75 2.1,1.75 -2.1,1.75 -2.1,-1.75
DM3ATSFPEJM5 [mm]
  rect 0.7x1.2 smd paste-1.2 mask-1.2: 1(2.775,7.412) 2(1.675,7.412) 3(0.575,7.412) 4(-0.525,7.412) 5(-1.625,7.412) 6(-2.725,7.412) 7(-3.825,7.412) 8(-4.925,7.412) MP2(-5.875,7.412)
  rect 1x1.2 smd paste-1.2 mask-1.2: MP1(4.325,7.412) MP3(-6.825,3.112)
  rect 1x0.8 smd paste-1 mask-1: MP4(-6.825,-3.087)
  rect 1x2.8 smd paste-2.8 mask-2.8: MP5(-6.825,-7.237)
  rect 1.3x1.9 smd paste-1.9 mask-1.9: MP6(6.675,-7.688)
  F.SilkS lines w0.254: -6.925,-5.313 -6.925,-4.063 ; -6.925,-2.063 -6.925,1.938 ; -6.925,4.438 -6.925,7.512 ; -5.75,-8.637 5.5,-8.637 ; 5.5,7.512 6.925,7.512 6.925,-6.313 ; 2.8,8.537 cw(c2.8,8.587) 2.8,8.637 ; 2.8,8.537 cw(c2.8,8.587) 2.8,8.637 ; 2.8,8.537 ccw(c2.8,8.587) 2.8,8.637
  F.CrtYd lines w0.254: -8.325,-9.637 8.325,-9.637 8.325,9.637 -8.325,9.637 -8.325,-9.637
EEE0JA152UAP#1 [mm]
  rect 4.1x2 on Mid2 paste-4.1 mask-4.1: 1(-4.35,0) 2(4.35,0)
  B.SilkS lines w0.254: -5.15,2.5 -2.5,5.15 5.15,5.15 5.15,2.5 ; -5.15,-2.5 -2.5,-5.15 5.15,-5.15 5.15,-2.5 ; -6.975,0 cw(c-6.95,0) -6.925,0 cw(c-6.95,0) -6.975,0
  B.CrtYd lines w0.254: -7.85,6.15 -7.85,-6.15 7.2,-6.15 7.2,6.15 -7.85,6.15
EEE0JA152UAP#2 [mm]
  rect 4.1x2 smd paste-4.1 mask-4.1: 1(-4.35,0) 2(4.35,0)
  F.SilkS lines w0.254: -5.15,2.5 -2.5,5.15 5.15,5.15 5.15,2.5 ; -5.15,-2.5 -2.5,-5.15 5.15,-5.15 5.15,-2.5 ; -6.975,0 cw(c-6.95,0) -6.925,0 cw(c-6.95,0) -6.975,0
  F.CrtYd lines w0.254: -7.85,6.15 -7.85,-6.15 7.2,-6.15 7.2,6.15 -7.85,6.15
F.SilkS_g8 [mm]
  F.SilkS region: 266 vertices and 0 holes, not listed, extent -2.943,-0.718 4.995,0.677
  F.SilkS region: 126 vertices and 1 holes, not listed, extent -4.99,-2.046 -1.587,2.053
  F.SilkS region: 3.946,-0.328 4.025,-0.33 4.076,-0.333 4.104,-0.341 4.118,-0.353 4.123,-0.371 4.124,-0.379 4.119,-0.425 4.103,-0.447 4.071,-0.454 4.007,-0.46 3.92,-0.464 3.828,-0.465 3.715,-0.464 3.637,-0.46 3.587,-0.452 3.561,-0.439 3.557,-0.435 3.538,-0.389 3.539,-0.366 3.545,-0.351 3.563,-0.34 3.597,-0.333 3.656,-0.33 3.746,-0.328 3.831,-0.328
Hirose_FH12-22S-0.5SH_1x22-1MP_P0.50mm_Horizontal [mm]
  rect 0.3x1.3 on Mid2 paste-1.3 mask-1.3: 1(-5.25,-1.85) 2(-4.75,-1.85) 3(-4.25,-1.85) 4(-3.75,-1.85) 5(-3.25,-1.85) 6(-2.75,-1.85) 7(-2.25,-1.85) 8(-1.75,-1.85) 9(-1.25,-1.85) 10(-0.75,-1.85) 11(-0.25,-1.85) 12(0.25,-1.85) 13(0.75,-1.85) 14(1.25,-1.85) 15(1.75,-1.85) 16(2.25,-1.85) 17(2.75,-1.85) 18(3.25,-1.85) 19(3.75,-1.85) 20(4.25,-1.85) 21(4.75,-1.85) 22(5.25,-1.85)
  rect 1.8x2.2 on Mid2 paste-2.2 mask-2.2: MP(-7.15,1.4) MP(7.15,1.4)
  B.SilkS lines w0.254: -5.66,-2.5 -5.66,-1.3 -7.15,-1.3 -7.15,0.04 ; 5.66,-1.3 7.15,-1.3 7.15,0.04 ; 7.15,2.76 7.15,4.5 -7.15,4.5 -7.15,2.76
  B.CrtYd lines w0.254: 8.55,-3 8.55,4.9 -8.55,4.9 -8.55,-3 8.55,-3
INDPM5050X400N [mm]
  rect 2.35x4.05 on Mid2 paste-4.05 mask-4.05: 1(-1.95,0) 2(1.95,0)
  B.SilkS lines w0.254: -2.5,2.5 2.5,2.5 ; -2.5,-2.5 2.5,-2.5
  B.CrtYd lines w0.254: -3.375,2.85 -3.375,-2.85 3.375,-2.85 3.375,2.85 -3.375,2.85
JST_GH_BM02B-GHS-TBT_1x02-1MP_P1.25mm_Vertical [mm]
  rrect25% 0.6x1.7 smd paste-1.7 mask-1.7: 1(-0.625,-1.95) 2(0.625,-1.95)
  rrect25% 1x2.8 smd paste-2.8 mask-2.8: MP(-2.475,1.4) MP(2.475,1.4)
  F.SilkS lines w0.254: -2.985,-0.26 -2.985,-1.86 -1.185,-1.86 -1.185,-2.8 ; -1.715,2.61 1.715,2.61 ; 1.185,-1.86 2.985,-1.86 2.985,-0.26
  F.CrtYd lines w0.254: -3.48,-3.3 3.48,-3.3 3.48,3.3 -3.48,3.3 -3.48,-3.3
JST_GH_SM07B-GHS-TB_1x07-1MP_P1.25mm_Horizontal [mm]
  rrect25% 0.6x1.7 on Mid2 paste-1.7 mask-1.7: 1(-3.75,-1.85) 2(-2.5,-1.85) 3(-1.25,-1.85) 4(0,-1.85) 5(1.25,-1.85) 6(2.5,-1.85) 7(3.75,-1.85)
  rrect25% 1x2.7 on Mid2 paste-2.7 mask-2.7: MP(-5.6,1.35) MP(5.6,1.35)
  B.SilkS lines w0.254: -4.31,-2.7 -4.31,-1.71 -6.11,-1.71 -6.11,-0.26 ; 4.31,-1.71 6.11,-1.71 6.11,-0.26 ; 4.84,2.56 -4.84,2.56
  B.CrtYd lines w0.254: 6.6,-3.2 6.6,3.2 -6.6,3.2 -6.6,-3.2 6.6,-3.2
JST_SH_BM04B-SRSS-TB_1x04-1MP_P1.00mm_Vertical [mm]
  rrect25% 0.6x1.55 smd paste-1.55 mask-1.55: 1(-1.5,-1.325) 2(-0.5,-1.325) 3(0.5,-1.325) 4(1.5,-1.325)
  rrect21% 1.2x1.8 smd paste-1.8 mask-1.8: MP(-2.8,1.2) MP(2.8,1.2)
  F.SilkS lines w0.254: -3.11,0.04 -3.11,-1.11 -2.06,-1.11 -2.06,-2.1 ; -1.94,2.01 1.94,2.01 ; 2.06,-1.11 3.11,-1.11 3.11,0.04
  F.CrtYd lines w0.254: -3.9,-2.6 3.9,-2.6 3.9,2.6 -3.9,2.6 -3.9,-2.6
LED_0603_1608Metric [mm]
  rrect25% 0.875x0.95 smd paste-0.95 mask-0.95: 1(-0.787,0) 2(0.787,0)
  F.SilkS lines w0.254: 0.8,-0.735 -1.485,-0.735 -1.485,0.735 0.8,0.735
  F.CrtYd lines w0.254: -1.48,-0.73 1.48,-0.73 1.48,0.73 -1.48,0.73 -1.48,-0.73
LM62460QRPHRQ1 [mm]
  rect 0.8x1.1 smd paste-1.1 mask-1.1: 1(-1.2,1.9) 15(1.2,1.9)
  rect 1.075x0.4 smd paste-1.075 mask-1.075: 2(-1.413,0.55) 14(1.413,0.55)
  rect 0.825x0.25 smd paste-0.825 mask-0.825: 3(-1.538,-0.525) 4(-1.538,-1.025) 5(-1.538,-1.525) 11(1.538,-1.525) 12(1.538,-1.025) 13(1.538,-0.525)
  rect 0.75x0.55 smd paste-0.75 mask-0.75: 6(-1.225,-2.175) 10(1.225,-2.175)
  rect 0.25x0.675 smd paste-0.675 mask-0.675: 7(-0.5,-2.113) 9(0.5,-2.113)
  rect 0.25x0.825 smd paste-0.825 mask-0.825: 8(0,-2.038)
  rect 0.35x2.975 smd paste-2.975 mask-2.975: 16(0,0.963)
  rect 0.35x0.75 smd paste-0.75 mask-0.75: 17(-1.775,1.725) 20(1.775,1.725)
  rect 0.35x0.2 smd paste-0.35 mask-0.35: 18(-1.775,-2) 19(1.775,-2)
  F.SilkS region: -1.3,2.7 -1.54,3.03 -1.06,3.03
  F.CrtYd lines w0.254: 2.95,3.45 -2.95,3.45 -2.95,-3.45 2.95,-3.45 2.95,3.45
MAX20008AFOCVYT [mm]
  rect 0.8x0.3 smd paste-0.8 mask-0.8: 1(-1.7,0.948) 2(-1.7,0.45) 10(1.7,0.45) 11(1.7,0.948)
  rect 1.5x0.25 smd paste-1.5 mask-1.5: 3(-1.35,-0.05) 4(-1.35,-0.7) 5(-1.35,-1.35) 7(1.35,-1.35) 8(1.35,-0.7) 9(1.35,-0.05)
  rect 0.35x2 smd paste-2 mask-2: 6(0,-1.225)
  rect 0.3x0.925 smd paste-0.925 mask-0.925: 12(1.25,1.763) 13(0.75,1.763) 14(0.25,1.763) 15(-0.25,1.763) 16(-0.75,1.763) 17(-1.25,1.763)
  F.SilkS region: -2.45,0.96 -2.78,0.72 -2.78,1.2
  F.CrtYd lines w0.254: -3.1,-3.225 3.1,-3.225 3.1,3.225 -3.1,3.225 -3.1,-3.225
MountingHole_2.7mm_M2.5 [mm]
  round 2.7 hole 2.7 paste-2539.97 mask-2.7: Un1(0,0)
  Cmts.User circle w0.254: c0,0 r2.7
  F.CrtYd circle w0.254: c0,0 r2.95
OSHW-Symbol_6.7x6mm_SilkScreen [mm]
  F.SilkS region: 337 vertices and 0 holes, not listed, extent -3.302,-2.948 3.321,2.976
P200_SOT-23 [mm]
  rrect25% 1x0.65 smd paste-1 mask-1: 1(0,0) 2(0,-2.05) 3(2.4,-1.03)
  F.SilkS lines w0.254: -0.575,0.62 1.1,0.62 2,0.62 ; 0.4,-2.68 1.1,-2.68 2,-2.68
  F.CrtYd lines w0.254: -0.82,-2.73 3.02,-2.73 3.02,0.67 -0.82,0.67 -0.82,-2.73
PinHeader_1x03_P2.54mm_Vertical [mm]
  rect 1.7x1.7 hole 1 paste-2539.97 mask-1.7: 1(0,0)
  round 1.7 hole 1 paste-2539.97 mask-1.7: 2(0,-2.54) 3(0,-5.08)
  F.SilkS lines w0.254: -1.38,0 -1.38,1.38 0,1.38 ; -1.38,-6.46 1.38,-6.46 1.38,-1.27 -1.38,-1.27 -1.38,-6.46
  F.CrtYd lines w0.254: -1.77,-6.85 1.77,-6.85 1.77,1.77 -1.77,1.77 -1.77,-6.85